# EAGLE board canSlaveV03_16s_nutzen (EAGLE 6.3), part 1 of 6
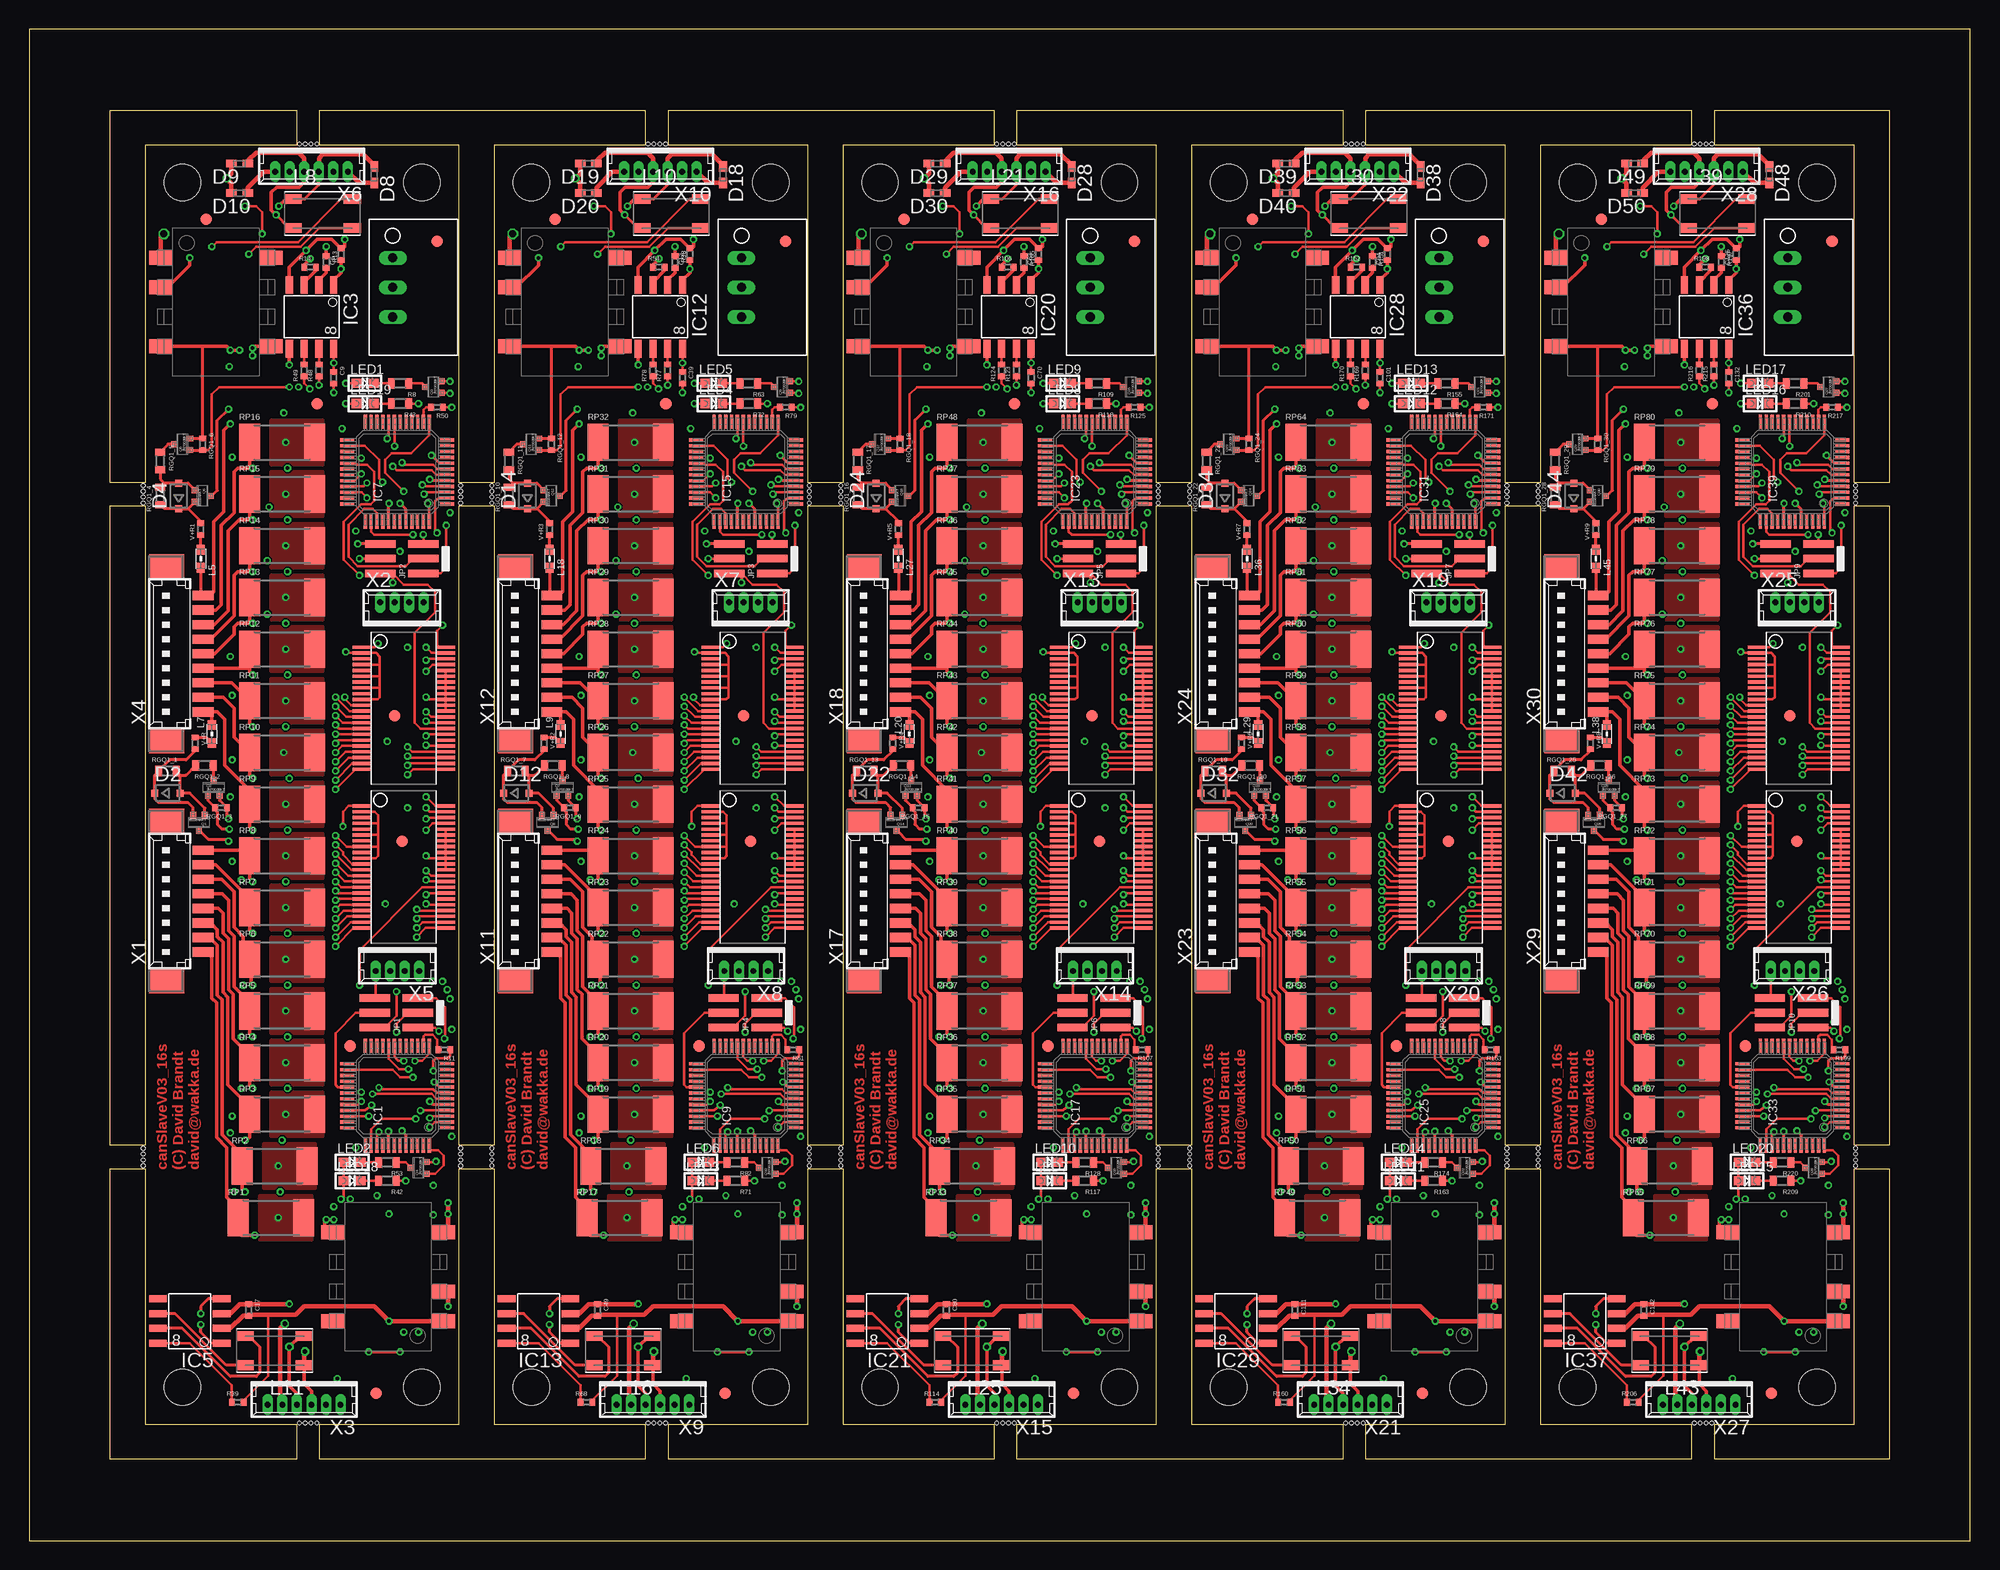
[diagram p0: board, top side]
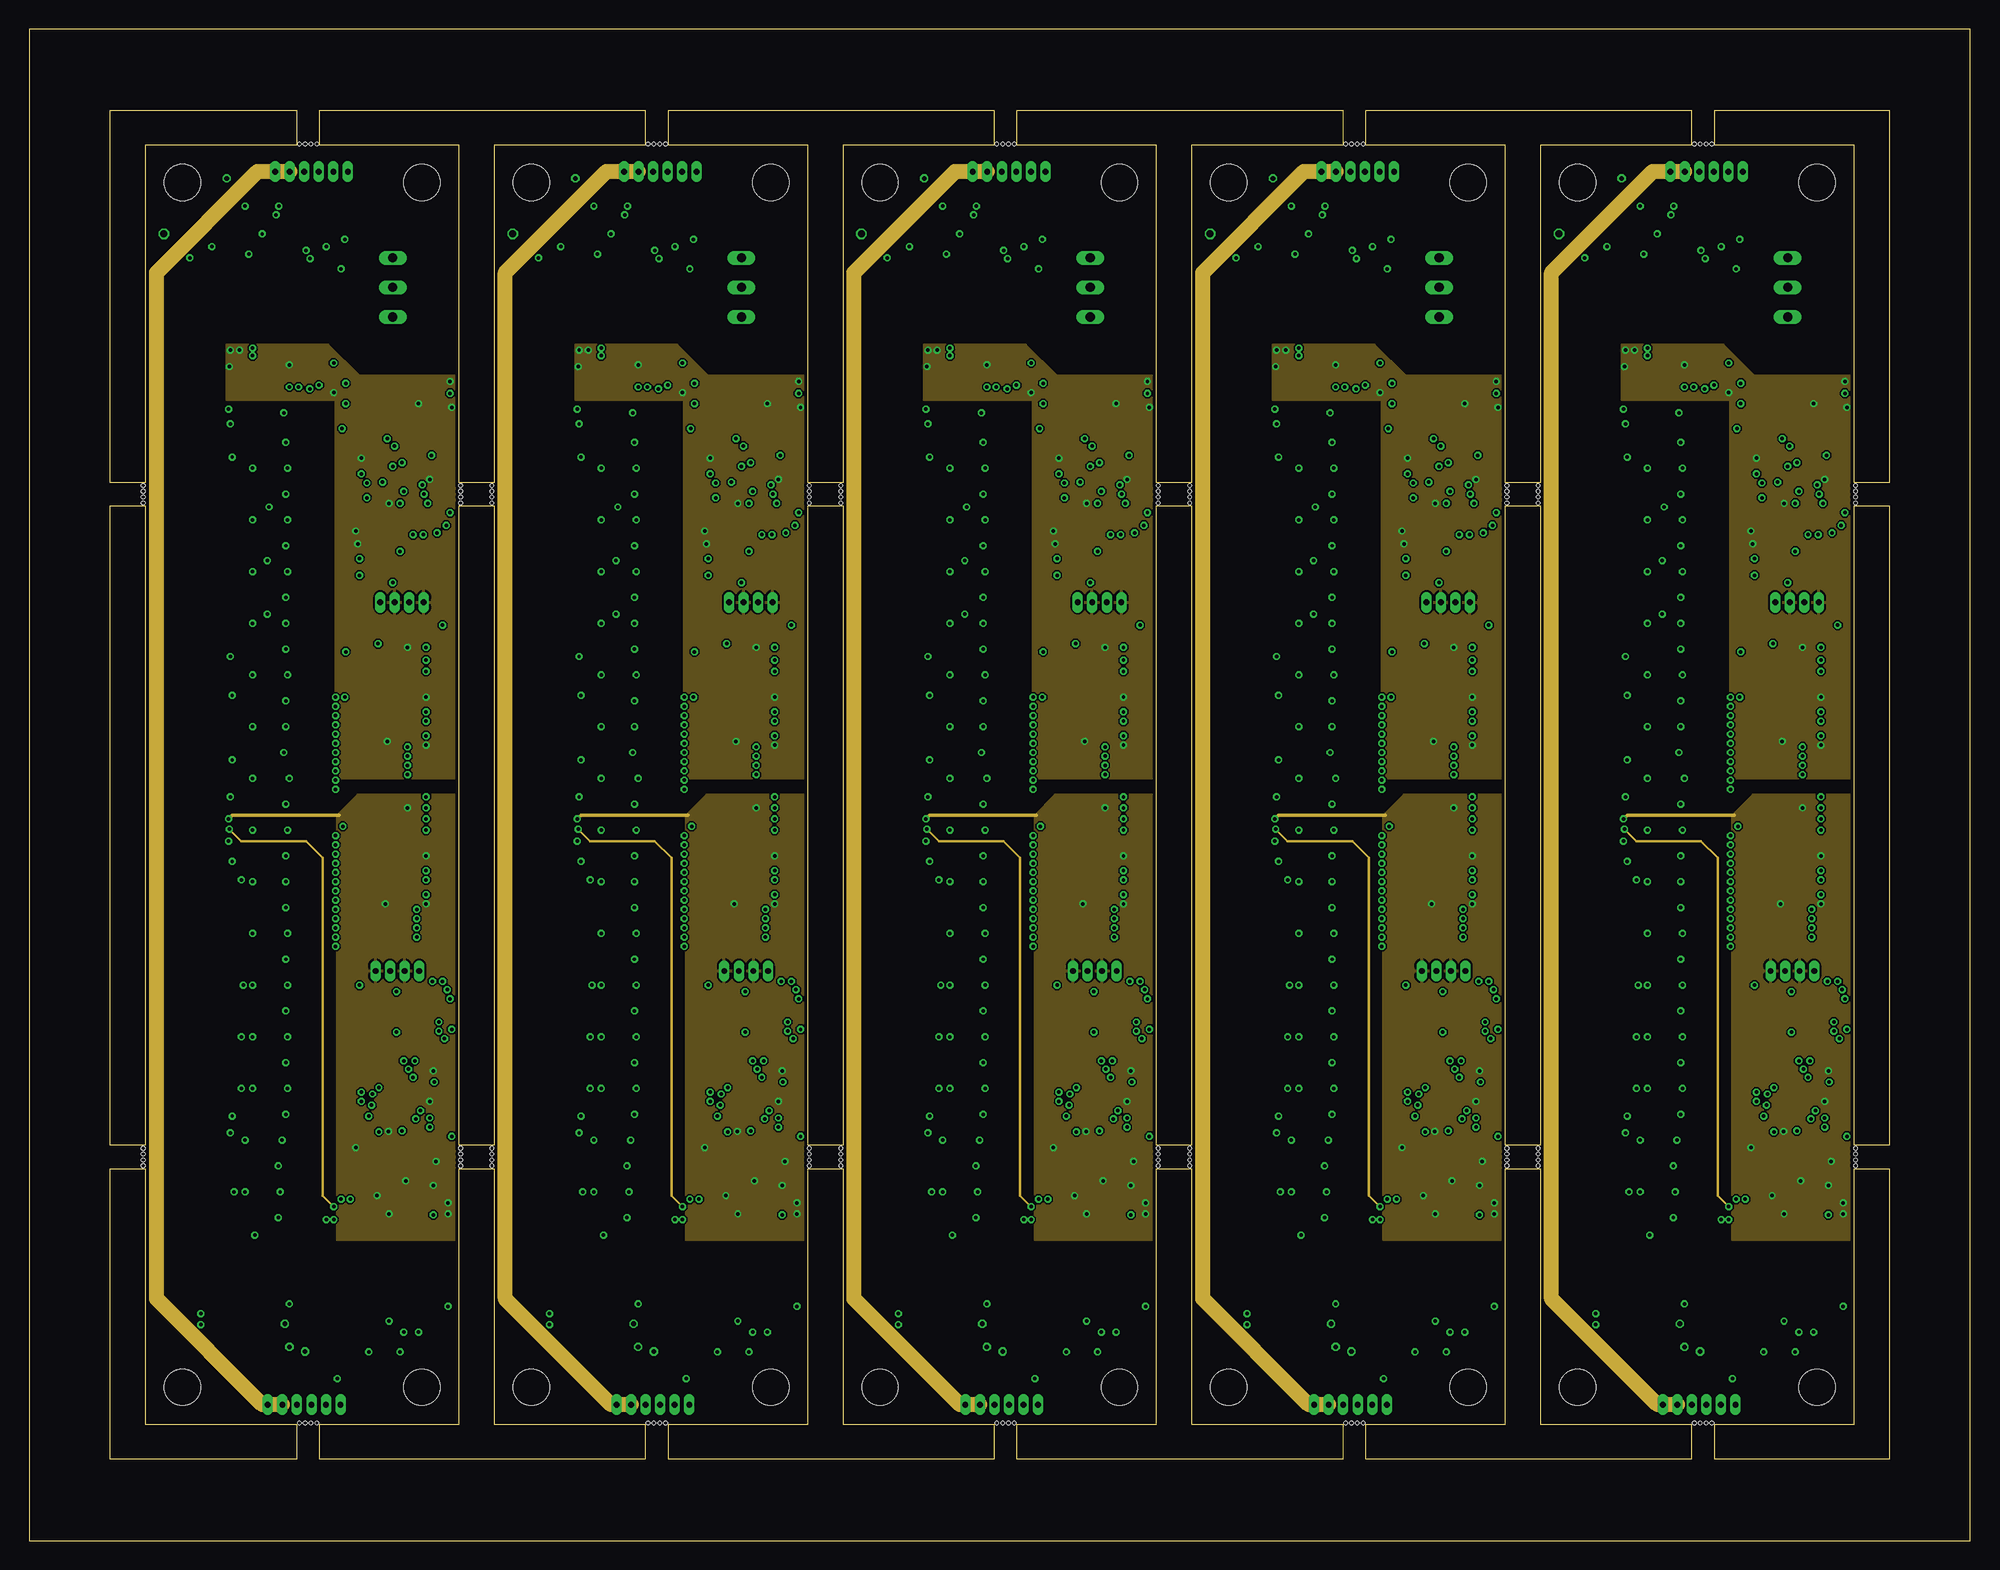
[diagram p1: board, inner layer Route2]
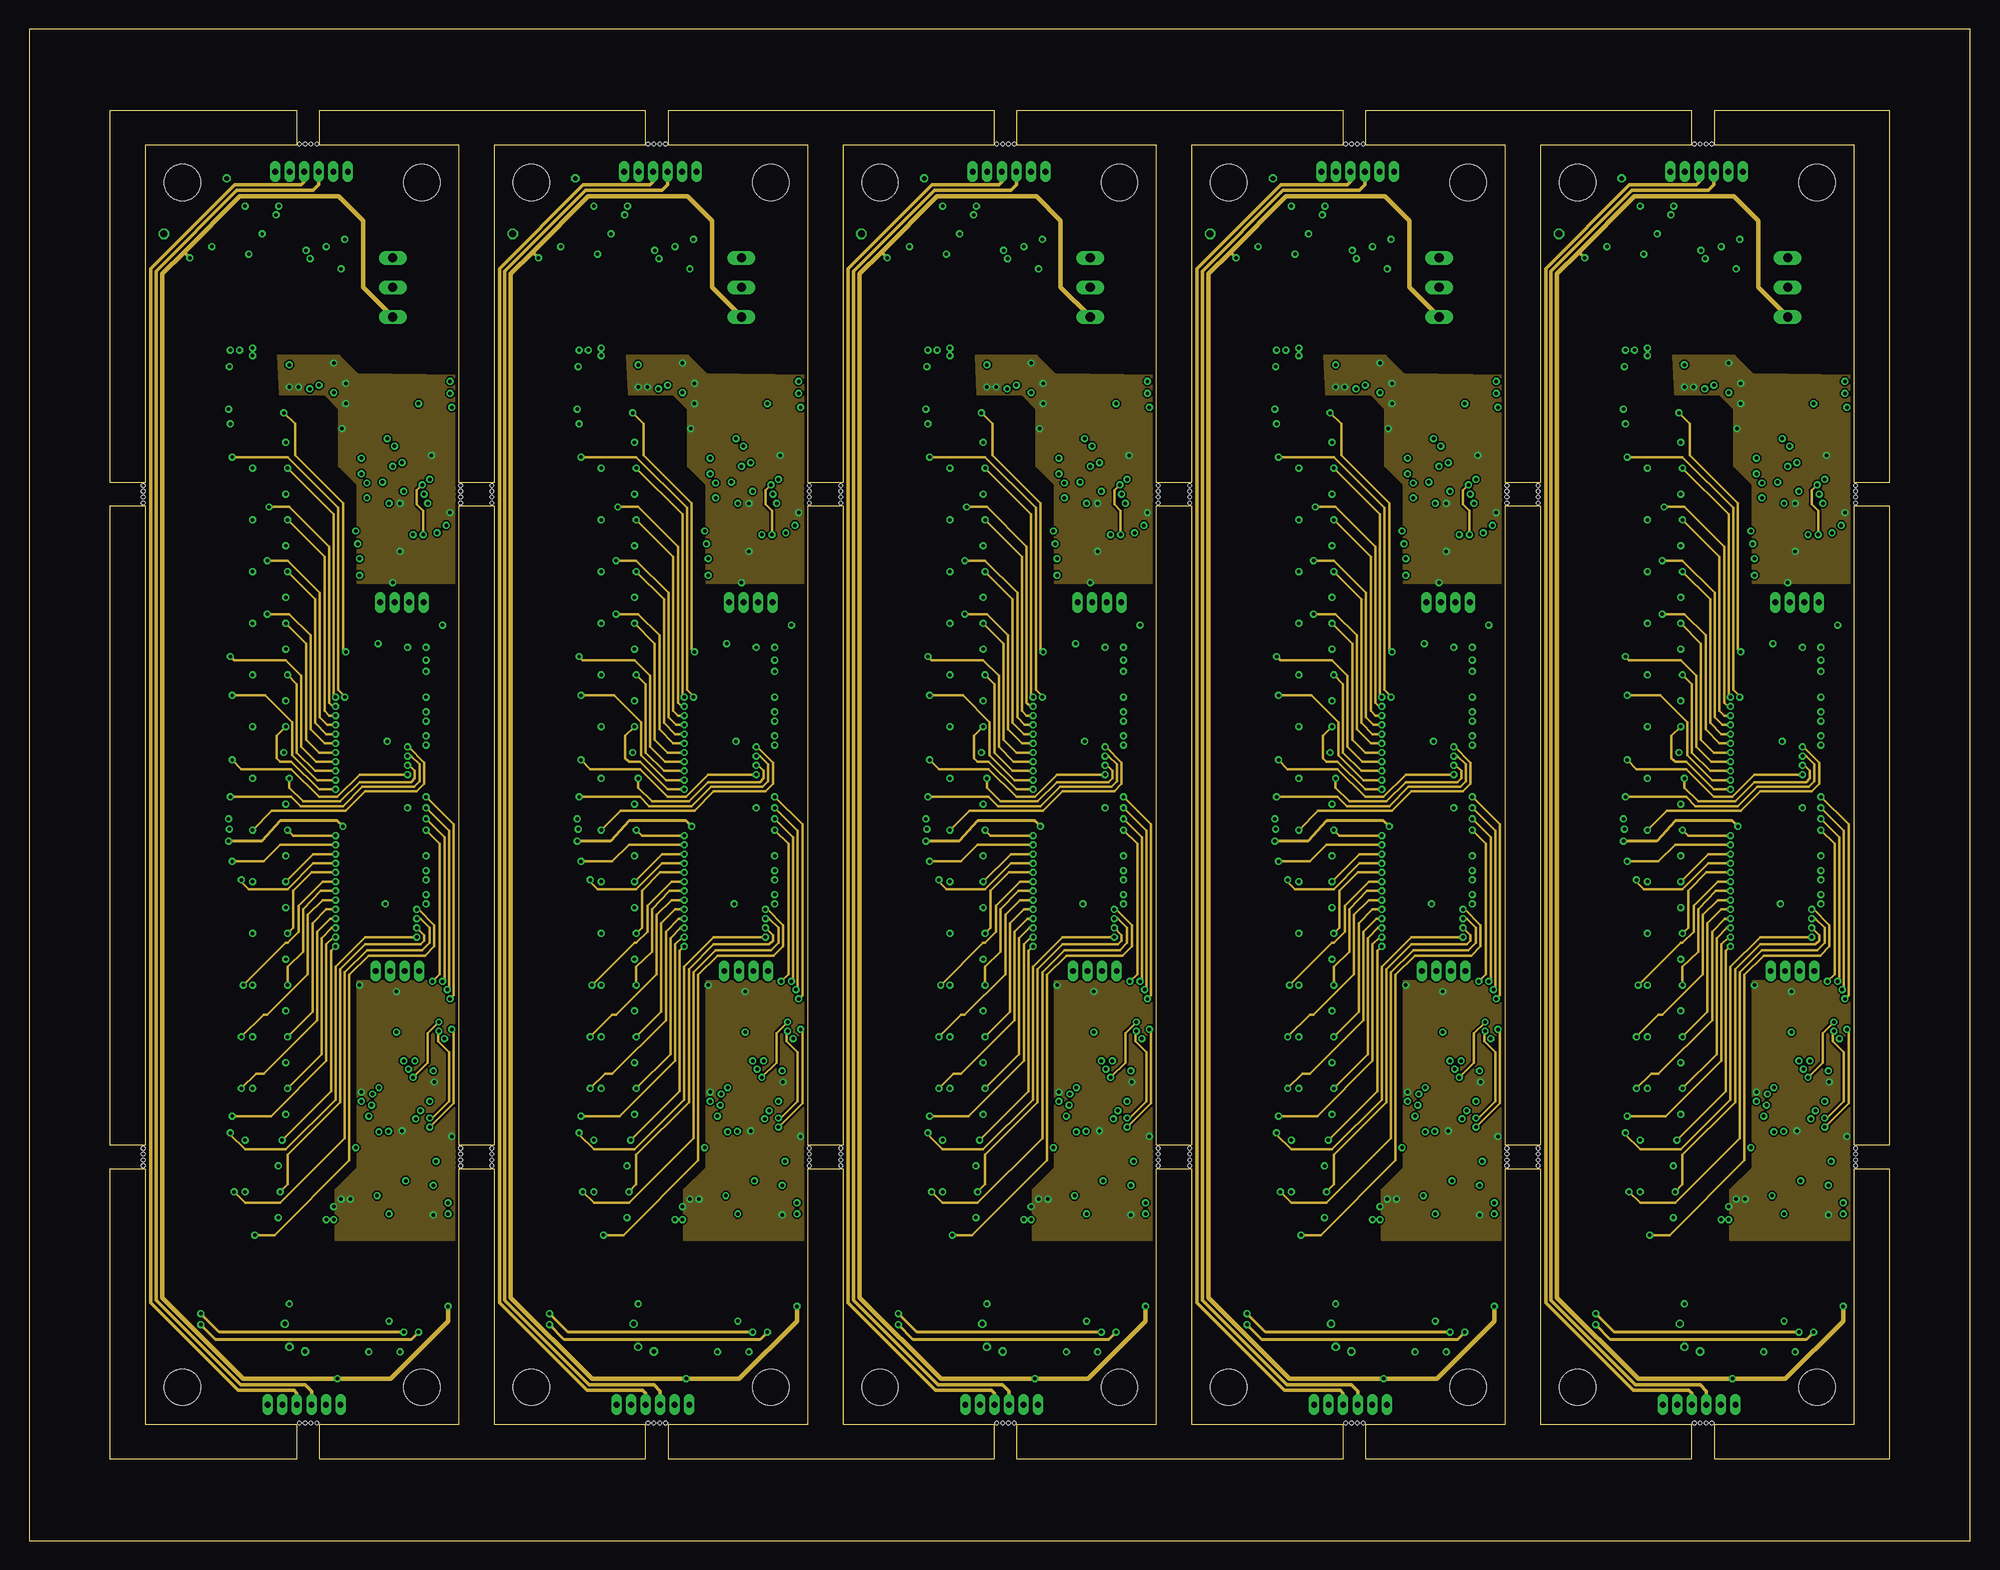
[diagram p2: board, inner layer Route15]
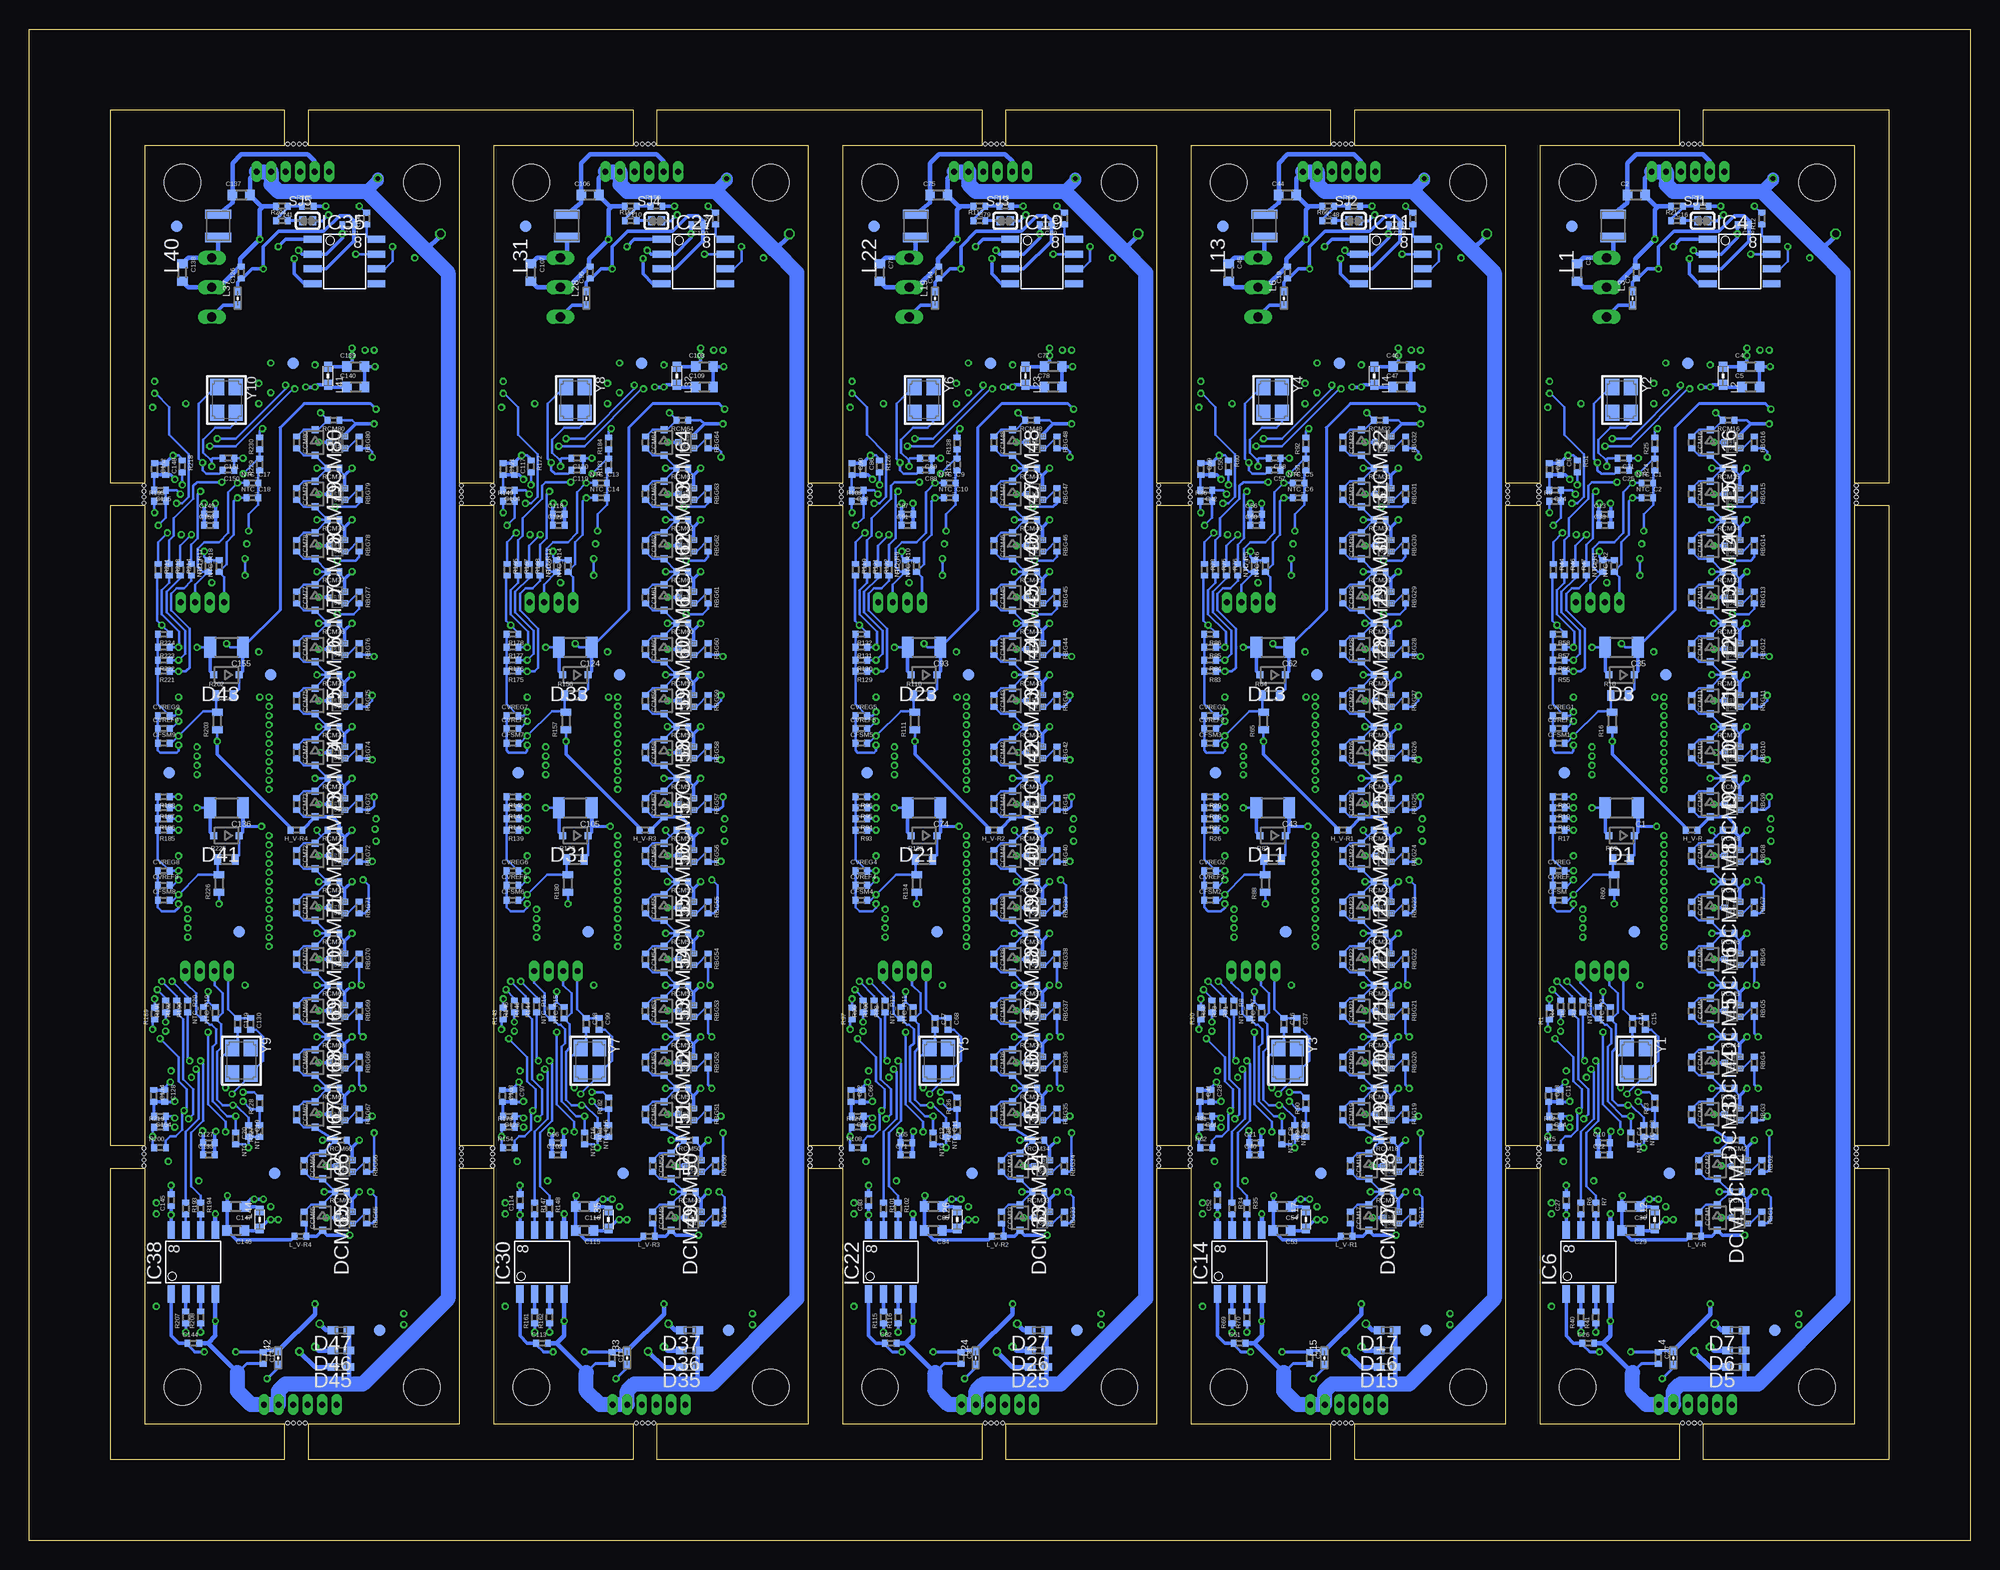
[diagram p3: board, bottom side, seen from below]

Size 167 x 130 mm. Coordinates in mm from the lower left corner, seen from the top.
Outline: 37,10 37,32 40,32 40,10 53,10 53,7 25,7 25,10 37,10
Outline: 37,34 37,89 40,89 40,34 37,34
Outline: 37,91 37,120 25,120 25,123 53,123 53,120 40,120 40,91 37,91
Outline: 23,123 23,120 10,120 10,91 7,91 7,123 23,123
Outline: 7,89 10,89 10,34 7,34 7,89
Outline: 7,32 10,32 10,10 23,10 23,7 7,7 7,32
Outline: 67,10 67,32 70,32 70,10 83,10 83,7 55,7 55,10 67,10
Outline: 67,34 67,89 70,89 70,34 67,34
Outline: 67,91 67,120 55,120 55,123 83,123 83,120 70,120 70,91 67,91
Outline: 97,10 97,32 100,32 100,10 113,10 113,7 85,7 85,10 97,10
Outline: 97,34 97,89 100,89 100,34 97,34
Outline: 97,91 97,120 85,120 85,123 113,123 113,120 100,120 100,91 97,91
Outline: 127,10 127,32 130,32 130,10 143,10 143,7 115,7 115,10 127,10
Outline: 127,34 127,89 130,89 130,34 127,34
Outline: 127,91 127,120 115,120 115,123 143,123 143,120 130,120 130,91 127,91
Outline: 157,10 157,32 160,32 160,7 145,7 145,10 157,10
Outline: 157,34 157,89 160,89 160,34 157,34
Outline: 157,91 157,120 145,120 145,123 160,123 160,91 157,91
Outline: 0,0 167,0 167,130 0,130 0,0
Copper layers (1+2*15+16): Top 0.035mm / dielectric 0.38mm / Route2 0.035mm / dielectric 0.71mm / Route15 0.035mm / dielectric 0.38mm / Bottom 0.035mm
Design rules "PCB-POOL Standard_ML4 *": minimum track width 0.15mm, minimum drill 0.3mm, track to track 0.15mm, track to pad 0.15mm, pad to pad 0.15mm, via to via 0.15mm, smd to smd 0.15mm, copper to edge 0.3mm, drill to drill 0.2mm, minimum pad ring 0.2mm, minimum via ring 0.15mm, stop-mask expansion 0.075mm, vias tented up to drill 0.41mm, thermal gap 0.2mm
Holes 3.1 mm at 33.8,13.2 13.2,13.2 33.8,116.8 13.2,116.8 63.8,13.2 43.2,13.2 63.8,116.8 43.2,116.8 93.8,13.2 73.2,13.2 93.8,116.8 73.2,116.8 123.8,13.2 103.2,13.2 123.8,116.8 103.2,116.8 153.8,13.2 133.2,13.2 153.8,116.8 133.2,116.8
Holes 0.3 mm at 23.25,10.12 23.75,10.12 24.25,10.12 24.75,10.12 53.25,10.12 53.75,10.12 54.25,10.12 54.75,10.12 83.25,10.12 83.75,10.12 84.25,10.12 84.75,10.12 113.25,10.12 113.75,10.12 114.25,10.12 114.75,10.12 143.25,10.12 143.75,10.12 144.25,10.12 144.75,10.12 143.25,120.12 143.75,120.12 144.25,120.12 144.75,120.12 113.25,120.12 113.75,120.12 114.25,120.12 114.75,120.12 83.25,120.12 83.75,120.12 84.25,120.12 84.75,120.12 53.25,120.12 53.75,120.12 54.25,120.12 54.75,120.12 23.25,120.12 23.75,120.12 24.25,120.12 24.75,120.12 39.83,89.25 39.83,89.75 39.83,90.25 39.83,90.75 39.83,32.25 39.83,32.75 39.83,33.25 39.83,33.75 69.83,89.25 69.83,89.75 69.83,90.25 69.83,90.75 69.83,32.25 69.83,32.75 69.83,33.25 69.83,33.75 99.83,89.25 99.83,89.75 99.83,90.25 99.83,90.75 99.83,32.25 99.83,32.75 99.83,33.25 99.83,33.75 129.82,89.25 129.82,89.75 129.82,90.25 129.82,90.75 129.82,32.25 129.82,32.75 129.82,33.25 129.82,33.75 37.12,89.25 37.12,89.75 37.12,90.25 37.12,90.75 37.12,32.25 37.12,32.75 37.12,33.25 37.12,33.75 67.12,89.25 67.12,89.75 67.12,90.25 67.12,90.75 67.12,32.25 67.12,32.75 67.12,33.25 67.12,33.75 97.12,89.25 97.12,89.75 97.12,90.25 97.12,90.75 97.12,32.25 97.12,32.75 97.12,33.25 97.12,33.75 127.12,89.25 127.12,89.75 127.12,90.25 127.12,90.75 127.12,32.25 127.12,32.75 127.12,33.25 127.12,33.75 157.12,89.25 157.12,89.75 157.12,90.25 157.12,90.75 157.12,32.25 157.12,32.75 157.12,33.25 157.12,33.75 9.82,89.25 9.82,89.75 9.82,90.25 9.82,90.75 9.82,32.25 9.82,32.75 9.82,33.25 9.82,33.75
tRestrict: area 30.8,10.2 to 36.8,16.2; area 10.2,10.2 to 16.2,16.2; area 30.8,113.8 to 36.8,119.8; area 10.2,113.8 to 16.2,119.8; area 60.8,10.2 to 66.8,16.2; area 40.2,10.2 to 46.2,16.2; area 60.8,113.8 to 66.8,119.8; area 40.2,113.8 to 46.2,119.8; area 90.8,10.2 to 96.8,16.2; area 70.2,10.2 to 76.2,16.2; area 90.8,113.8 to 96.8,119.8; area 70.2,113.8 to 76.2,119.8; area 120.8,10.2 to 126.8,16.2; area 100.2,10.2 to 106.2,16.2; area 120.8,113.8 to 126.8,119.8; area 100.2,113.8 to 106.2,119.8; area 150.8,10.2 to 156.8,16.2; area 130.2,10.2 to 136.2,16.2; area 150.8,113.8 to 156.8,119.8; area 130.2,113.8 to 136.2,119.8
bRestrict: area 30.8,10.2 to 36.8,16.2; area 10.2,10.2 to 16.2,16.2; area 30.8,113.8 to 36.8,119.8; area 10.2,113.8 to 16.2,119.8; area 60.8,10.2 to 66.8,16.2; area 40.2,10.2 to 46.2,16.2; area 60.8,113.8 to 66.8,119.8; area 40.2,113.8 to 46.2,119.8; area 90.8,10.2 to 96.8,16.2; area 70.2,10.2 to 76.2,16.2; area 90.8,113.8 to 96.8,119.8; area 70.2,113.8 to 76.2,119.8; area 120.8,10.2 to 126.8,16.2; area 100.2,10.2 to 106.2,16.2; area 120.8,113.8 to 126.8,119.8; area 100.2,113.8 to 106.2,119.8; area 150.8,10.2 to 156.8,16.2; area 130.2,10.2 to 136.2,16.2; area 150.8,113.8 to 156.8,119.8; area 130.2,113.8 to 136.2,119.8

## Footprints (pad centres in the part's own frame; a part is rotated, then mirrored left to right if it is on the bottom)
C1206 = smd 1 x 1.8: 1 -1.4,0; 2 1.4,0
C0603 = smd 0.8 x 0.9: 1 -0.75,0; 2 0.75,0
C0402 = smd 0.5 x 0.6: 1 -0.5,0; 2 0.5,0
SOD323-R = smd 0.6 x 0.6: A 1.1,0; C -1.1,0
WESURGE_0402 = smd 0.9 x 0.65: 1 -0.7,0; 2 0.7,0
ISF = smd 1.2 x 2: 1 -3.81,-4.75; 2 -1.27,-4.75; 4 3.81,-4.75; 5 3.81,4.75; 8 -3.81,4.75
TSR1 = drill 0.8 long: 1 -2.54,0; 2 0,0; 3 2.54,0
FIDUCIAL_1MM = smd 1 x 1: 1 0,0
R0402 = smd 0.5 x 0.6: 1 -0.5,0; 2 0.5,0
LQFP48 = smd 0.28 x 1.2: 1 -2.75,-4.3; 2 -2.25,-4.3; 3 -1.75,-4.3; 4 -1.25,-4.3; 5 -0.75,-4.3; 6 -0.25,-4.3; 7 0.25,-4.3; 8 0.75,-4.3; 9 1.25,-4.3; 10 1.75,-4.3; 11 2.25,-4.3; 12 2.75,-4.3; 25 2.75,4.3; 26 2.25,4.3; 27 1.75,4.3; 28 1.25,4.3; 29 0.75,4.3; 30 0.25,4.3; 31 -0.25,4.3; 32 -0.75,4.3; 33 -1.25,4.3; 34 -1.75,4.3; 35 -2.25,4.3; 36 -2.75,4.3 | smd 1.2 x 0.28: 13 4.3,-2.75; 14 4.3,-2.25; 15 4.3,-1.75; 16 4.3,-1.25; 17 4.3,-0.75; 18 4.3,-0.25; 19 4.3,0.25; 20 4.3,0.75; 21 4.3,1.25; 22 4.3,1.75; 23 4.3,2.25; 24 4.3,2.75; 37 -4.3,2.75; 38 -4.3,2.25; 39 -4.3,1.75; 40 -4.3,1.25; 41 -4.3,0.75; 42 -4.3,0.25; 43 -4.3,-0.25; 44 -4.3,-0.75; 45 -4.3,-1.25; 46 -4.3,-1.75; 47 -4.3,-2.25; 48 -4.3,-2.75
44SSOP = smd 1.6 x 0.28: 1 -3.6,5.25; 2 -3.6,4.75; 3 -3.6,4.25; 4 -3.6,3.75; 5 -3.6,3.25; 6 -3.6,2.75; 7 -3.6,2.25; 8 -3.6,1.75; 9 -3.6,1.25; 10 -3.6,0.75; 11 -3.6,0.25; 12 -3.6,-0.25; 13 -3.6,-0.75; 14 -3.6,-1.25; 15 -3.6,-1.75; 16 -3.6,-2.25; 17 -3.6,-2.75; 18 -3.6,-3.25; 19 -3.6,-3.75; 20 -3.6,-4.25; 21 -3.6,-4.75; 22 -3.6,-5.25; 23 3.6,-5.25; 24 3.6,-4.75; 25 3.6,-4.25; 26 3.6,-3.75; 27 3.6,-3.25; 28 3.6,-2.75; 29 3.6,-2.25; 30 3.6,-1.75; 31 3.6,-1.25; 32 3.6,-0.75; 33 3.6,-0.25; 34 3.6,0.25; 35 3.6,0.75; 36 3.6,1.25; 37 3.6,1.75; 38 3.6,2.25; 39 3.6,2.75; 40 3.6,3.25; 41 3.6,3.75; 42 3.6,4.25; 43 3.6,4.75; 44 3.6,5.25
SO-8 = smd 1.524 x 0.61: 1 -2.743,1.905; 2 -2.743,0.635; 3 -2.743,-0.635; 4 -2.743,-1.905; 5 2.743,-1.905; 6 2.743,-0.635; 7 2.743,0.635; 8 2.743,1.905
2X03_1.27MM_SMT = smd 0.65 x 2.6: 1 -1.27,-1.85; 2 -1.27,1.85; 3 0,-1.85; 4 0,1.85; 5 1.27,-1.85; 6 1.27,1.85
WE-PMI_1008 = smd 0.8 x 2.2: 1 -1,0; 2 1,0
0603 = smd 0.85 x 0.7: 1 -0.775,0; 2 0.775,0
0402 = smd 0.7 x 0.6: 1 -0.6,0; 2 0.6,0
WE-SL1 = smd 1.5 x 0.85: 1 -2.55,-1.25; 3 -2.55,1.25; 4 2.55,1.25; 5 2.55,-1.25
CHIPLED_0603 = smd 0.8 x 0.8: A 0,-0.75; C 0,0.75
SOT416 = smd 0.5 x 0.6: 1 -0.5,-0.65; 2 0.5,-0.65; 3 0,0.65
R0603 = smd 0.6 x 0.9: 1 -0.75,0; 2 0.75,0
R2512 = smd 1.8 x 3.2: 1 -2.8,0; 2 2.8,0
SOLDERJUMPER_REFLOW_NOPASTE_SMALL = smd 0.584 x 0.762: 1 -0.445,0; 2 0.445,0
53398-08 = smd 0.8 x 1.8: 1 4.375,-2.5; 2 3.125,-2.5; 3 1.875,-2.5; 4 0.625,-2.5; 5 -0.625,-2.5; 6 -1.875,-2.5; 7 -3.125,-2.5; 8 -4.375,-2.5 | smd 2.1 x 3: S1 6.875,0.625; S2 -6.875,0.625
53047-04 = drill 0.5 pad 0.698 long: 1 1.875,0.45; 2 0.625,0.45; 3 -0.625,0.45; 4 -1.875,0.45
53047-06 = drill 0.5 pad 0.698 long: 1 3.125,0.45; 2 1.875,0.45; 3 0.625,0.45; 4 -0.625,0.45; 5 -1.875,0.45; 6 -3.125,0.45
53398-09 = smd 0.8 x 1.8: 1 5,-2.5; 2 3.75,-2.5; 3 2.5,-2.5; 4 1.25,-2.5; 5 0,-2.5; 6 -1.25,-2.5; 7 -2.5,-2.5; 8 -3.75,-2.5; 9 -5,-2.5 | smd 2.1 x 3: S1 7.5,0.625; S2 -7.5,0.625
CRYSTAL_3.2X2.5 = smd 1.4 x 1.2: 1 -1.1,-0.8; 2 1.1,0.8; GND1 -1.1,0.8; GND2 1.1,-0.8

## Placement (x,y rotation side)
C1  10u,50V  [C1206]  30.02,63.02 180 bottom
C2  10u,50V  [C0603]  28.75,115.73 0 bottom
C3  10u,50V  [C0603]  33.83,109.06 270 bottom
C4  10u,50V  [C0603]  18.9,100.96 0 bottom
C5  10u,50V  [C0603]  18.9,99.22 0 bottom
C6  100n  [C0402]  26.84,110.65 90 top
C7  1u  [C0402]  28.75,109.06 90 bottom
C8  10n  [C0402]  35.25,92.15 270 bottom
C9  100n  [C0402]  26.2,100.01 270 top
C10  10n  [C0402]  31.52,34.21 0 bottom
C11  10n  [C0402]  35.33,38.26 270 bottom
C12  100n  [C0402]  56.84,110.65 90 top
C13  10n  [C0402]  31.44,88.26 0 bottom
C14  18p  [C0402]  29.06,44.45 270 bottom
C15  18p  [C0402]  27.95,44.45 270 bottom
C16  47n  [C0402]  25.25,114.78 180 bottom
C17  100n  [C0402]  18.9,19.84 270 top
C18  100n  [C0402]  19.54,113.19 180 bottom
C19  1u  [C0402]  58.74,109.06 90 bottom
C20  1u  [C0402]  26.84,15.71 270 bottom
C21  10n  [C0402]  61.52,34.21 0 bottom
C22  100n  [C0402]  31.52,33.18 0 bottom
C23  100n  [C0402]  36.29,38.26 270 bottom
C24  100n  [C0402]  35.73,90.33 180 bottom
C25  18p  [C0402]  29.86,92.07 180 bottom
C26  100n  [C0402]  32.87,16.98 0 bottom
C27  100n  [C0402]  34.78,29.29 90 bottom
C28  10n  [C0402]  65.33,38.26 270 bottom
C29  10u,50V  [C0603]  29.22,26.67 180 bottom
C30  10u,50V  [C0603]  29.22,28.73 180 bottom
C31  18p  [C0402]  29.86,93.11 180 bottom
C32  100n  [C0402]  36.21,92.15 270 bottom
C33  100n  [C0402]  31.44,87.31 0 bottom
C34  100n  [C0402]  35.73,36.51 180 bottom
C35  10u,50V  [C1206]  30.02,76.83 180 bottom
C36  18p  [C0402]  59.06,44.45 270 bottom
C37  18p  [C0402]  57.95,44.45 270 bottom
C38  100n  [C0402]  49.54,113.19 180 bottom
C39  100n  [C0402]  56.2,100.01 270 top
C40  100n  [C0402]  61.52,33.18 0 bottom
C41  100n  [C0402]  66.29,38.26 270 bottom
C42  100n  [C0402]  65.73,90.33 180 bottom
C43  10u,50V  [C1206]  60.02,63.02 180 bottom
C44  10u,50V  [C0603]  58.74,115.73 0 bottom
C45  10u,50V  [C0603]  63.83,109.06 270 bottom
C46  10u,50V  [C0603]  48.9,100.96 0 bottom
C47  10u,50V  [C0603]  48.9,99.22 0 bottom
C48  47n  [C0402]  55.25,114.78 180 bottom
C49  100n  [C0402]  48.9,19.84 270 top
C50  1u  [C0402]  56.84,15.71 270 bottom
C51  100n  [C0402]  62.87,16.98 0 bottom
C52  100n  [C0402]  64.78,29.29 90 bottom
C53  10u,50V  [C0603]  59.22,26.67 180 bottom
C54  10u,50V  [C0603]  59.22,28.73 180 bottom
C55  10n  [C0402]  65.25,92.15 270 bottom
C56  10n  [C0402]  61.44,88.26 0 bottom
C57  18p  [C0402]  59.86,92.07 180 bottom
C58  18p  [C0402]  59.86,93.11 180 bottom
C59  100n  [C0402]  66.21,92.15 270 bottom
C60  100n  [C0402]  61.44,87.31 0 bottom
C61  100n  [C0402]  65.73,36.51 180 bottom
C62  10u,50V  [C1206]  60.02,76.83 180 bottom
C63  100n  [C0402]  86.84,110.65 90 top
C64  1u  [C0402]  88.75,109.06 90 bottom
C65  10n  [C0402]  91.52,34.21 0 bottom
C66  10n  [C0402]  95.33,38.26 270 bottom
C67  18p  [C0402]  89.06,44.45 270 bottom
C68  18p  [C0402]  87.95,44.45 270 bottom
C69  100n  [C0402]  79.54,113.19 180 bottom
C70  100n  [C0402]  86.2,100.01 270 top
C71  100n  [C0402]  91.52,33.18 0 bottom
C72  100n  [C0402]  96.29,38.26 270 bottom
C73  100n  [C0402]  95.73,90.33 180 bottom
C74  10u,50V  [C1206]  90.02,63.02 180 bottom
C75  10u,50V  [C0603]  88.75,115.73 0 bottom
C76  10u,50V  [C0603]  93.83,109.06 270 bottom
C77  10u,50V  [C0603]  78.9,100.96 0 bottom
C78  10u,50V  [C0603]  78.9,99.22 0 bottom
C79  47n  [C0402]  85.25,114.78 180 bottom
C80  100n  [C0402]  78.9,19.84 270 top
C81  1u  [C0402]  86.84,15.71 270 bottom
C82  100n  [C0402]  92.87,16.98 0 bottom
C83  100n  [C0402]  94.78,29.29 90 bottom
C84  10u,50V  [C0603]  89.22,26.67 180 bottom
C85  10u,50V  [C0603]  89.22,28.73 180 bottom
C86  10n  [C0402]  95.25,92.15 270 bottom
C87  10n  [C0402]  91.44,88.26 0 bottom
C88  18p  [C0402]  89.86,92.07 180 bottom
C89  18p  [C0402]  89.86,93.11 180 bottom
C90  100n  [C0402]  96.21,92.15 270 bottom
C91  100n  [C0402]  91.44,87.31 0 bottom
C92  100n  [C0402]  95.73,36.51 180 bottom
C93  10u,50V  [C1206]  90.02,76.83 180 bottom
C94  100n  [C0402]  116.84,110.65 90 top
C95  1u  [C0402]  118.75,109.06 90 bottom
C96  10n  [C0402]  121.52,34.21 0 bottom
C97  10n  [C0402]  125.33,38.26 270 bottom
C98  18p  [C0402]  119.06,44.45 270 bottom
C99  18p  [C0402]  117.95,44.45 270 bottom
C100  100n  [C0402]  109.54,113.19 180 bottom
C101  100n  [C0402]  116.2,100.01 270 top
C102  100n  [C0402]  121.52,33.18 0 bottom
C103  100n  [C0402]  126.29,38.26 270 bottom
C104  100n  [C0402]  125.73,90.33 180 bottom
C105  10u,50V  [C1206]  120.02,63.02 180 bottom
C106  10u,50V  [C0603]  118.75,115.73 0 bottom
C107  10u,50V  [C0603]  123.83,109.06 270 bottom
C108  10u,50V  [C0603]  108.9,100.96 0 bottom
C109  10u,50V  [C0603]  108.9,99.22 0 bottom
C110  47n  [C0402]  115.25,114.78 180 bottom
C111  100n  [C0402]  108.9,19.84 270 top
C112  1u  [C0402]  116.84,15.71 270 bottom
C113  100n  [C0402]  122.87,16.98 0 bottom
C114  100n  [C0402]  124.78,29.29 90 bottom
C115  10u,50V  [C0603]  119.22,26.67 180 bottom
C116  10u,50V  [C0603]  119.22,28.73 180 bottom
C117  10n  [C0402]  125.25,92.15 270 bottom
C118  10n  [C0402]  121.44,88.26 0 bottom
C119  18p  [C0402]  119.86,92.07 180 bottom
C120  18p  [C0402]  119.86,93.11 180 bottom
C121  100n  [C0402]  126.21,92.15 270 bottom
C122  100n  [C0402]  121.44,87.31 0 bottom
C123  100n  [C0402]  125.73,36.51 180 bottom
C124  10u,50V  [C1206]  120.02,76.83 180 bottom
C125  100n  [C0402]  146.84,110.65 90 top
C126  1u  [C0402]  148.75,109.06 90 bottom
C127  10n  [C0402]  151.52,34.21 0 bottom
C128  10n  [C0402]  155.33,38.26 270 bottom
C129  18p  [C0402]  149.06,44.45 270 bottom
C130  18p  [C0402]  147.95,44.45 270 bottom
C131  100n  [C0402]  139.54,113.19 180 bottom
C132  100n  [C0402]  146.21,100.01 270 top
C133  100n  [C0402]  151.52,33.18 0 bottom
C134  100n  [C0402]  156.29,38.26 270 bottom
C135  100n  [C0402]  155.73,90.33 180 bottom
C136  10u,50V  [C1206]  150.01,63.02 180 bottom
C137  10u,50V  [C0603]  148.75,115.73 0 bottom
C138  10u,50V  [C0603]  153.82,109.06 270 bottom
C139  10u,50V  [C0603]  138.9,100.96 0 bottom
C140  10u,50V  [C0603]  138.9,99.22 0 bottom
C141  47n  [C0402]  145.25,114.78 180 bottom
C142  100n  [C0402]  138.9,19.84 270 top
C143  1u  [C0402]  146.84,15.71 270 bottom
C144  100n  [C0402]  152.87,16.98 0 bottom
C145  100n  [C0402]  154.78,29.29 90 bottom
C146  10u,50V  [C0603]  149.22,26.67 180 bottom
C147  10u,50V  [C0603]  149.22,28.73 180 bottom
C148  10n  [C0402]  155.25,92.15 270 bottom
C149  10n  [C0402]  151.44,88.26 0 bottom
C150  18p  [C0402]  149.86,92.07 180 bottom
C151  18p  [C0402]  149.86,93.11 180 bottom
C152  100n  [C0402]  156.21,92.15 270 bottom
C153  100n  [C0402]  151.44,87.31 0 bottom
C154  100n  [C0402]  155.73,36.51 180 bottom
C155  10u,50V  [C1206]  150.01,76.83 180 bottom
CCM1  100n  [C0402]  23.35,27.78 270 bottom
CCM2  100n  [C0402]  23.35,32.23 270 bottom
CCM3  100n  [C0402]  23.98,36.67 270 bottom
CCM4  100n  [C0402]  23.98,41.12 270 bottom
CCM5  100n  [C0402]  23.98,45.56 270 bottom
CCM6  100n  [C0402]  23.98,50.01 270 bottom
CCM7  100n  [C0402]  23.98,54.45 270 bottom
CCM8  100n  [C0402]  23.98,58.9 270 bottom
CCM9  100n  [C0402]  23.98,63.34 270 bottom
CCM10  100n  [C0402]  23.98,67.78 270 bottom
CCM11  100n  [C0402]  23.98,72.23 270 bottom
CCM12  100n  [C0402]  23.98,76.67 270 bottom
CCM13  100n  [C0402]  23.98,81.12 270 bottom
CCM14  100n  [C0402]  23.98,85.56 270 bottom
CCM15  100n  [C0402]  23.98,90.01 270 bottom
CCM16  100n  [C0402]  23.98,94.45 270 bottom
CCM17  100n  [C0402]  53.35,27.78 270 bottom
CCM18  100n  [C0402]  53.35,32.23 270 bottom
CCM19  100n  [C0402]  53.98,36.67 270 bottom
CCM20  100n  [C0402]  53.98,41.12 270 bottom
CCM21  100n  [C0402]  53.98,45.56 270 bottom
CCM22  100n  [C0402]  53.98,50.01 270 bottom
CCM23  100n  [C0402]  53.98,54.45 270 bottom
CCM24  100n  [C0402]  53.98,58.9 270 bottom
CCM25  100n  [C0402]  53.98,63.34 270 bottom
CCM26  100n  [C0402]  53.98,67.78 270 bottom
CCM27  100n  [C0402]  53.98,72.23 270 bottom
CCM28  100n  [C0402]  53.98,76.67 270 bottom
CCM29  100n  [C0402]  53.98,81.12 270 bottom
CCM30  100n  [C0402]  53.98,85.56 270 bottom
CCM31  100n  [C0402]  53.98,90.01 270 bottom
CCM32  100n  [C0402]  53.98,94.45 270 bottom
CCM33  100n  [C0402]  83.35,27.78 270 bottom
CCM34  100n  [C0402]  83.35,32.23 270 bottom
CCM35  100n  [C0402]  83.98,36.67 270 bottom
CCM36  100n  [C0402]  83.98,41.12 270 bottom
CCM37  100n  [C0402]  83.98,45.56 270 bottom
CCM38  100n  [C0402]  83.98,50.01 270 bottom
CCM39  100n  [C0402]  83.98,54.45 270 bottom
CCM40  100n  [C0402]  83.98,58.9 270 bottom
CCM41  100n  [C0402]  83.98,63.34 270 bottom
CCM42  100n  [C0402]  83.98,67.78 270 bottom
CCM43  100n  [C0402]  83.98,72.23 270 bottom
CCM44  100n  [C0402]  83.98,76.67 270 bottom
CCM45  100n  [C0402]  83.98,81.12 270 bottom
CCM46  100n  [C0402]  83.98,85.56 270 bottom
CCM47  100n  [C0402]  83.98,90.01 270 bottom
CCM48  100n  [C0402]  83.98,94.45 270 bottom
CCM49  100n  [C0402]  113.35,27.78 270 bottom
CCM50  100n  [C0402]  113.35,32.23 270 bottom
CCM51  100n  [C0402]  113.98,36.67 270 bottom
CCM52  100n  [C0402]  113.98,41.12 270 bottom
CCM53  100n  [C0402]  113.98,45.56 270 bottom
CCM54  100n  [C0402]  113.98,50.01 270 bottom
CCM55  100n  [C0402]  113.98,54.45 270 bottom
CCM56  100n  [C0402]  113.98,58.9 270 bottom
CCM57  100n  [C0402]  113.98,63.34 270 bottom
CCM58  100n  [C0402]  113.98,67.78 270 bottom
CCM59  100n  [C0402]  113.98,72.23 270 bottom
CCM60  100n  [C0402]  113.98,76.67 270 bottom
CCM61  100n  [C0402]  113.98,81.12 270 bottom
CCM62  100n  [C0402]  113.98,85.56 270 bottom
CCM63  100n  [C0402]  113.98,90.01 270 bottom
CCM64  100n  [C0402]  113.98,94.45 270 bottom
CCM65  100n  [C0402]  143.35,27.78 270 bottom
CCM66  100n  [C0402]  143.35,32.23 270 bottom
CCM67  100n  [C0402]  143.98,36.67 270 bottom
CCM68  100n  [C0402]  143.98,41.12 270 bottom
CCM69  100n  [C0402]  143.98,45.56 270 bottom
CCM70  100n  [C0402]  143.98,50.01 270 bottom
CCM71  100n  [C0402]  143.98,54.45 270 bottom
CCM72  100n  [C0402]  143.98,58.9 270 bottom
CCM73  100n  [C0402]  143.98,63.34 270 bottom
CCM74  100n  [C0402]  143.98,67.78 270 bottom
CCM75  100n  [C0402]  143.98,72.23 270 bottom
CCM76  100n  [C0402]  143.98,76.67 270 bottom
CCM77  100n  [C0402]  143.98,81.12 270 bottom
CCM78  100n  [C0402]  143.98,85.56 270 bottom
CCM79  100n  [C0402]  143.98,90.01 270 bottom
CCM80  100n  [C0402]  143.98,94.45 270 bottom
CFSM  1u  [C0402]  35.41,55.09 0 bottom
CFSM1  1u  [C0402]  35.41,68.58 0 bottom
CFSM2  1u  [C0402]  65.41,55.09 0 bottom
CFSM3  1u  [C0402]  65.41,68.58 0 bottom
CFSM4  1u  [C0402]  95.41,55.09 0 bottom
CFSM5  1u  [C0402]  95.41,68.58 0 bottom
CFSM6  1u  [C0402]  125.41,55.09 0 bottom
CFSM7  1u  [C0402]  125.41,68.58 0 bottom
CFSM8  1u  [C0402]  155.41,55.09 0 bottom
CFSM9  1u  [C0402]  155.41,68.58 0 bottom
CVREF  1u  [C0402]  35.41,56.35 0 bottom
CVREF1  1u  [C0402]  35.41,69.85 0 bottom
CVREF2  1u  [C0402]  65.41,56.35 0 bottom
CVREF3  1u  [C0402]  65.41,69.85 0 bottom
CVREF4  1u  [C0402]  95.41,56.35 0 bottom
CVREF5  1u  [C0402]  95.41,69.85 0 bottom
CVREF6  1u  [C0402]  125.41,56.35 0 bottom
CVREF7  1u  [C0402]  125.41,69.85 0 bottom
CVREF8  1u  [C0402]  155.41,56.35 0 bottom
CVREF9  1u  [C0402]  155.41,69.85 0 bottom
CVREG  1u  [C0402]  35.41,57.62 0 bottom
CVREG1  1u  [C0402]  35.41,70.96 0 bottom
CVREG2  1u  [C0402]  65.41,57.62 0 bottom
CVREG3  1u  [C0402]  65.41,70.96 0 bottom
CVREG4  1u  [C0402]  95.41,57.62 0 bottom
CVREG5  1u  [C0402]  95.41,70.96 0 bottom
CVREG6  1u  [C0402]  125.41,57.62 0 bottom
CVREG7  1u  [C0402]  125.41,70.96 0 bottom
CVREG8  1u  [C0402]  155.41,57.62 0 bottom
CVREG9  1u  [C0402]  155.41,70.96 0 bottom
D1  40V  [SOD323-R]  30.02,60.64 180 bottom
D2  12V  [SOD323-R]  11.92,64.29 0 top
D3  40V  [SOD323-R]  30.02,74.45 180 bottom
D4  12V  [SOD323-R]  12.87,89.85 90 top
D5  WE-VE_0402  [WESURGE_0402]  20.17,14.92 0 bottom
D6  WE-VE_0402  [WESURGE_0402]  20.17,16.35 0 bottom
D7  WE-VE_0402  [WESURGE_0402]  20.17,18.1 0 bottom
D8  WE-VE_0402  [WESURGE_0402]  29.7,117.47 90 top
D9  WE-VE_0402  [WESURGE_0402]  18.11,118.43 0 top
D10  WE-VE_0402  [WESURGE_0402]  18.11,115.89 0 top
D11  40V  [SOD323-R]  60.02,60.64 180 bottom
D12  12V  [SOD323-R]  41.92,64.29 0 top
D13  40V  [SOD323-R]  60.02,74.45 180 bottom
D14  12V  [SOD323-R]  42.87,89.85 90 top
D15  WE-VE_0402  [WESURGE_0402]  50.17,14.92 0 bottom
D16  WE-VE_0402  [WESURGE_0402]  50.17,16.35 0 bottom
D17  WE-VE_0402  [WESURGE_0402]  50.17,18.1 0 bottom
D18  WE-VE_0402  [WESURGE_0402]  59.7,117.47 90 top
D19  WE-VE_0402  [WESURGE_0402]  48.11,118.43 0 top
D20  WE-VE_0402  [WESURGE_0402]  48.11,115.89 0 top
D21  40V  [SOD323-R]  90.02,60.64 180 bottom
D22  12V  [SOD323-R]  71.92,64.29 0 top
D23  40V  [SOD323-R]  90.02,74.45 180 bottom
D24  12V  [SOD323-R]  72.87,89.85 90 top
D25  WE-VE_0402  [WESURGE_0402]  80.17,14.92 0 bottom
D26  WE-VE_0402  [WESURGE_0402]  80.17,16.35 0 bottom
D27  WE-VE_0402  [WESURGE_0402]  80.17,18.1 0 bottom
D28  WE-VE_0402  [WESURGE_0402]  89.7,117.47 90 top
D29  WE-VE_0402  [WESURGE_0402]  78.11,118.43 0 top
D30  WE-VE_0402  [WESURGE_0402]  78.11,115.89 0 top
D31  40V  [SOD323-R]  120.02,60.64 180 bottom
D32  12V  [SOD323-R]  101.92,64.29 0 top
D33  40V  [SOD323-R]  120.02,74.45 180 bottom
D34  12V  [SOD323-R]  102.87,89.85 90 top
D35  WE-VE_0402  [WESURGE_0402]  110.17,14.92 0 bottom
D36  WE-VE_0402  [WESURGE_0402]  110.17,16.35 0 bottom
D37  WE-VE_0402  [WESURGE_0402]  110.17,18.1 0 bottom
D38  WE-VE_0402  [WESURGE_0402]  119.7,117.47 90 top
D39  WE-VE_0402  [WESURGE_0402]  108.11,118.43 0 top
D40  WE-VE_0402  [WESURGE_0402]  108.11,115.89 0 top
D41  40V  [SOD323-R]  150.01,60.64 180 bottom
D42  12V  [SOD323-R]  131.92,64.29 0 top
D43  40V  [SOD323-R]  150.01,74.45 180 bottom
D44  12V  [SOD323-R]  132.87,89.85 90 top
D45  WE-VE_0402  [WESURGE_0402]  140.17,14.92 0 bottom
D46  WE-VE_0402  [WESURGE_0402]  140.17,16.35 0 bottom
D47  WE-VE_0402  [WESURGE_0402]  140.17,18.1 0 bottom
D48  WE-VE_0402  [WESURGE_0402]  149.7,117.47 90 top
D49  WE-VE_0402  [WESURGE_0402]  138.11,118.43 0 top
D50  WE-VE_0402  [WESURGE_0402]  138.11,115.89 0 top
DCDC1  TES 1-0510  [ISF]  16.08,106.52 270 top
DCDC2  TES 1-0510  [ISF]  30.89,22.7 90 top
DCDC3  TES 1-0510  [ISF]  46.08,106.52 270 top
DCDC4  TES 1-0510  [ISF]  60.89,22.7 90 top
DCDC5  TES 1-0510  [ISF]  76.08,106.52 270 top
DCDC6  TES 1-0510  [ISF]  90.89,22.7 90 top
DCDC7  TES 1-0510  [ISF]  106.08,106.52 270 top
DCDC8  TES 1-0510  [ISF]  120.89,22.7 90 top
DCDC9  TES 1-0510  [ISF]  136.08,106.52 270 top
DCDC10  TES 1-0510  [ISF]  150.89,22.7 90 top
DCIN  TSR 1-2450  [TSR1]  31.29,107.79 270 top
DCIN1  TSR 1-2450  [TSR1]  61.28,107.79 270 top
DCIN2  TSR 1-2450  [TSR1]  91.28,107.79 270 top
DCIN3  TSR 1-2450  [TSR1]  121.28,107.79 270 top
DCIN4  TSR 1-2450  [TSR1]  151.28,107.79 270 top
DCM1  7.5  [SOD323-R]  21.76,27.78 270 bottom
DCM2  7.5  [SOD323-R]  21.76,32.23 270 bottom
DCM3  7.5  [SOD323-R]  22.39,36.67 270 bottom
DCM4  7.5  [SOD323-R]  22.39,41.12 270 bottom
DCM5  7.5  [SOD323-R]  22.39,45.56 270 bottom
DCM6  7.5  [SOD323-R]  22.39,50.01 270 bottom
DCM7  7.5  [SOD323-R]  22.39,54.45 270 bottom
DCM8  7.5  [SOD323-R]  22.39,58.9 270 bottom
DCM9  7.5  [SOD323-R]  22.39,63.34 270 bottom
DCM10  7.5  [SOD323-R]  22.39,67.78 270 bottom
DCM11  7.5  [SOD323-R]  22.39,72.23 270 bottom
DCM12  7.5  [SOD323-R]  22.39,76.67 270 bottom
DCM13  7.5  [SOD323-R]  22.39,81.12 270 bottom
DCM14  7.5  [SOD323-R]  22.39,85.56 270 bottom
DCM15  7.5  [SOD323-R]  22.39,90.01 270 bottom
DCM16  7.5  [SOD323-R]  22.39,94.45 270 bottom
DCM17  7.5  [SOD323-R]  51.76,27.78 270 bottom
DCM18  7.5  [SOD323-R]  51.76,32.23 270 bottom
DCM19  7.5  [SOD323-R]  52.4,36.67 270 bottom
DCM20  7.5  [SOD323-R]  52.4,41.12 270 bottom
DCM21  7.5  [SOD323-R]  52.4,45.56 270 bottom
DCM22  7.5  [SOD323-R]  52.4,50.01 270 bottom
DCM23  7.5  [SOD323-R]  52.4,54.45 270 bottom
DCM24  7.5  [SOD323-R]  52.4,58.9 270 bottom
DCM25  7.5  [SOD323-R]  52.4,63.34 270 bottom
DCM26  7.5  [SOD323-R]  52.4,67.78 270 bottom
DCM27  7.5  [SOD323-R]  52.4,72.23 270 bottom
DCM28  7.5  [SOD323-R]  52.4,76.67 270 bottom
DCM29  7.5  [SOD323-R]  52.4,81.12 270 bottom
DCM30  7.5  [SOD323-R]  52.4,85.56 270 bottom
DCM31  7.5  [SOD323-R]  52.4,90.01 270 bottom
DCM32  7.5  [SOD323-R]  52.4,94.45 270 bottom
DCM33  7.5  [SOD323-R]  81.76,27.78 270 bottom
DCM34  7.5  [SOD323-R]  81.76,32.23 270 bottom
DCM35  7.5  [SOD323-R]  82.39,36.67 270 bottom
DCM36  7.5  [SOD323-R]  82.39,41.12 270 bottom
DCM37  7.5  [SOD323-R]  82.39,45.56 270 bottom
DCM38  7.5  [SOD323-R]  82.39,50.01 270 bottom
DCM39  7.5  [SOD323-R]  82.39,54.45 270 bottom
DCM40  7.5  [SOD323-R]  82.39,58.9 270 bottom
DCM41  7.5  [SOD323-R]  82.39,63.34 270 bottom
DCM42  7.5  [SOD323-R]  82.39,67.78 270 bottom
DCM43  7.5  [SOD323-R]  82.39,72.23 270 bottom
DCM44  7.5  [SOD323-R]  82.39,76.67 270 bottom
DCM45  7.5  [SOD323-R]  82.39,81.12 270 bottom
DCM46  7.5  [SOD323-R]  82.39,85.56 270 bottom
DCM47  7.5  [SOD323-R]  82.39,90.01 270 bottom
DCM48  7.5  [SOD323-R]  82.39,94.45 270 bottom
DCM49  7.5  [SOD323-R]  111.76,27.78 270 bottom
DCM50  7.5  [SOD323-R]  111.76,32.23 270 bottom
DCM51  7.5  [SOD323-R]  112.39,36.67 270 bottom
DCM52  7.5  [SOD323-R]  112.39,41.12 270 bottom
DCM53  7.5  [SOD323-R]  112.39,45.56 270 bottom
DCM54  7.5  [SOD323-R]  112.39,50.01 270 bottom
DCM55  7.5  [SOD323-R]  112.39,54.45 270 bottom
DCM56  7.5  [SOD323-R]  112.39,58.9 270 bottom
DCM57  7.5  [SOD323-R]  112.39,63.34 270 bottom
DCM58  7.5  [SOD323-R]  112.39,67.78 270 bottom
DCM59  7.5  [SOD323-R]  112.39,72.23 270 bottom
DCM60  7.5  [SOD323-R]  112.39,76.67 270 bottom
DCM61  7.5  [SOD323-R]  112.39,81.12 270 bottom
DCM62  7.5  [SOD323-R]  112.39,85.56 270 bottom
DCM63  7.5  [SOD323-R]  112.39,90.01 270 bottom
DCM64  7.5  [SOD323-R]  112.39,94.45 270 bottom
DCM65  7.5  [SOD323-R]  141.76,27.78 270 bottom
DCM66  7.5  [SOD323-R]  141.76,32.23 270 bottom
DCM67  7.5  [SOD323-R]  142.4,36.67 270 bottom
DCM68  7.5  [SOD323-R]  142.4,41.12 270 bottom
DCM69  7.5  [SOD323-R]  142.4,45.56 270 bottom
DCM70  7.5  [SOD323-R]  142.4,50.01 270 bottom
DCM71  7.5  [SOD323-R]  142.4,54.45 270 bottom
DCM72  7.5  [SOD323-R]  142.4,58.9 270 bottom
DCM73  7.5  [SOD323-R]  142.4,63.34 270 bottom
DCM74  7.5  [SOD323-R]  142.4,67.78 270 bottom
DCM75  7.5  [SOD323-R]  142.4,72.23 270 bottom
DCM76  7.5  [SOD323-R]  142.4,76.67 270 bottom
DCM77  7.5  [SOD323-R]  142.4,81.12 270 bottom
DCM78  7.5  [SOD323-R]  142.4,85.56 270 bottom
DCM79  7.5  [SOD323-R]  142.4,90.01 270 bottom
DCM80  7.5  [SOD323-R]  142.4,94.45 270 bottom
FID1  FIDUCIAL""  [FIDUCIAL_1MM]  32.08,60.16 90 top
FID2  FIDUCIAL""  [FIDUCIAL_1MM]  31.44,70.96 90 top
FID3  FIDUCIAL""  [FIDUCIAL_1MM]  29.86,12.7 90 top
FID4  FIDUCIAL""  [FIDUCIAL_1MM]  15.25,113.66 90 top
FID5  FIDUCIAL""  [FIDUCIAL_1MM]  35.09,111.76 90 top
FID6  FIDUCIAL""  [FIDUCIAL_1MM]  24.78,97.79 90 top
FID7  FIDUCIAL""  [FIDUCIAL_1MM]  27.63,42.54 90 top
FID8  FIDUCIAL""  [FIDUCIAL_1MM]  24.3,101.28 270 bottom
FID9  FIDUCIAL""  [FIDUCIAL_1MM]  25.89,31.59 270 bottom
FID10  FIDUCIAL""  [FIDUCIAL_1MM]  16.84,18.1 270 bottom
FID11  FIDUCIAL""  [FIDUCIAL_1MM]  28.9,52.39 270 bottom
FID12  FIDUCIAL""  [FIDUCIAL_1MM]  34.3,113.03 270 bottom
FID13  FIDUCIAL""  [FIDUCIAL_1MM]  26.2,74.45 270 bottom
FID14  FIDUCIAL""  [FIDUCIAL_1MM]  34.94,66.04 270 bottom
FID15  FIDUCIAL""  [FIDUCIAL_1MM]  62.08,60.16 90 top
FID16  FIDUCIAL""  [FIDUCIAL_1MM]  61.44,70.96 90 top
FID17  FIDUCIAL""  [FIDUCIAL_1MM]  59.86,12.7 90 top
FID18  FIDUCIAL""  [FIDUCIAL_1MM]  45.25,113.66 90 top
FID19  FIDUCIAL""  [FIDUCIAL_1MM]  65.09,111.76 90 top
FID20  FIDUCIAL""  [FIDUCIAL_1MM]  54.78,97.79 90 top
FID21  FIDUCIAL""  [FIDUCIAL_1MM]  57.63,42.54 90 top
FID22  FIDUCIAL""  [FIDUCIAL_1MM]  54.3,101.28 270 bottom
FID23  FIDUCIAL""  [FIDUCIAL_1MM]  55.89,31.59 270 bottom
FID24  FIDUCIAL""  [FIDUCIAL_1MM]  46.84,18.1 270 bottom
FID25  FIDUCIAL""  [FIDUCIAL_1MM]  58.9,52.39 270 bottom
FID26  FIDUCIAL""  [FIDUCIAL_1MM]  64.3,113.03 270 bottom
FID27  FIDUCIAL""  [FIDUCIAL_1MM]  56.2,74.45 270 bottom
FID28  FIDUCIAL""  [FIDUCIAL_1MM]  64.94,66.04 270 bottom
FID29  FIDUCIAL""  [FIDUCIAL_1MM]  92.08,60.16 90 top
FID30  FIDUCIAL""  [FIDUCIAL_1MM]  91.44,70.96 90 top
FID31  FIDUCIAL""  [FIDUCIAL_1MM]  89.86,12.7 90 top
FID32  FIDUCIAL""  [FIDUCIAL_1MM]  75.25,113.66 90 top
FID33  FIDUCIAL""  [FIDUCIAL_1MM]  95.09,111.76 90 top
FID34  FIDUCIAL""  [FIDUCIAL_1MM]  84.78,97.79 90 top
FID35  FIDUCIAL""  [FIDUCIAL_1MM]  87.63,42.54 90 top
FID36  FIDUCIAL""  [FIDUCIAL_1MM]  84.3,101.28 270 bottom
FID37  FIDUCIAL""  [FIDUCIAL_1MM]  85.89,31.59 270 bottom
FID38  FIDUCIAL""  [FIDUCIAL_1MM]  76.84,18.1 270 bottom
FID39  FIDUCIAL""  [FIDUCIAL_1MM]  88.9,52.39 270 bottom
FID40  FIDUCIAL""  [FIDUCIAL_1MM]  94.3,113.03 270 bottom
FID41  FIDUCIAL""  [FIDUCIAL_1MM]  86.2,74.45 270 bottom
FID42  FIDUCIAL""  [FIDUCIAL_1MM]  94.94,66.04 270 bottom
FID43  FIDUCIAL""  [FIDUCIAL_1MM]  122.08,60.16 90 top
FID44  FIDUCIAL""  [FIDUCIAL_1MM]  121.44,70.96 90 top
FID45  FIDUCIAL""  [FIDUCIAL_1MM]  119.86,12.7 90 top
FID46  FIDUCIAL""  [FIDUCIAL_1MM]  105.25,113.66 90 top
FID47  FIDUCIAL""  [FIDUCIAL_1MM]  125.09,111.76 90 top
FID48  FIDUCIAL""  [FIDUCIAL_1MM]  114.78,97.79 90 top
FID49  FIDUCIAL""  [FIDUCIAL_1MM]  117.63,42.54 90 top
FID50  FIDUCIAL""  [FIDUCIAL_1MM]  114.3,101.28 270 bottom
FID51  FIDUCIAL""  [FIDUCIAL_1MM]  115.89,31.59 270 bottom
FID52  FIDUCIAL""  [FIDUCIAL_1MM]  106.84,18.1 270 bottom
FID53  FIDUCIAL""  [FIDUCIAL_1MM]  118.9,52.39 270 bottom
FID54  FIDUCIAL""  [FIDUCIAL_1MM]  124.3,113.03 270 bottom
FID55  FIDUCIAL""  [FIDUCIAL_1MM]  116.2,74.45 270 bottom
FID56  FIDUCIAL""  [FIDUCIAL_1MM]  124.94,66.04 270 bottom
FID57  FIDUCIAL""  [FIDUCIAL_1MM]  152.08,60.16 90 top
FID58  FIDUCIAL""  [FIDUCIAL_1MM]  151.44,70.96 90 top
FID59  FIDUCIAL""  [FIDUCIAL_1MM]  149.86,12.7 90 top
FID60  FIDUCIAL""  [FIDUCIAL_1MM]  135.25,113.66 90 top
FID61  FIDUCIAL""  [FIDUCIAL_1MM]  155.09,111.76 90 top
FID62  FIDUCIAL""  [FIDUCIAL_1MM]  144.78,97.79 90 top
FID63  FIDUCIAL""  [FIDUCIAL_1MM]  147.63,42.54 90 top
FID64  FIDUCIAL""  [FIDUCIAL_1MM]  144.3,101.28 270 bottom
FID65  FIDUCIAL""  [FIDUCIAL_1MM]  145.89,31.59 270 bottom
FID66  FIDUCIAL""  [FIDUCIAL_1MM]  136.84,18.1 270 bottom
FID67  FIDUCIAL""  [FIDUCIAL_1MM]  148.9,52.39 270 bottom
FID68  FIDUCIAL""  [FIDUCIAL_1MM]  154.3,113.03 270 bottom
FID69  FIDUCIAL""  [FIDUCIAL_1MM]  146.21,74.45 270 bottom
FID70  FIDUCIAL""  [FIDUCIAL_1MM]  154.94,66.04 270 bottom
H_V-R  100  [R0402]  23.98,61.12 180 bottom
H_V-R1  100  [R0402]  53.98,61.12 180 bottom
H_V-R2  100  [R0402]  83.98,61.12 180 bottom
H_V-R3  100  [R0402]  113.98,61.12 180 bottom
H_V-R4  100  [R0402]  143.98,61.12 180 bottom
IC1  LPC11C1X  [LQFP48]  31.68,38.26 90 top
IC2  LTC6803-4  [44SSOP]  32.24,57.94 0 top
IC3  ADUM1201  [SO-8]  24.3,105.25 270 top
IC4  MCP2551  [SO-8]  19.86,110.01 0 bottom
IC5  MCP2551  [SO-8]  13.82,18.89 180 top
IC6  ADUM1201  [SO-8]  32.87,23.97 90 bottom
IC7  LPC11C1X  [LQFP48]  31.68,91.92 90 top
IC8  LTC6803-4  [44SSOP]  32.24,71.59 0 top
IC9  LPC11C1X  [LQFP48]  61.68,38.26 90 top
IC10  LTC6803-4  [44SSOP]  62.24,57.94 0 top
IC11  MCP2551  [SO-8]  49.85,110.01 0 bottom
IC12  ADUM1201  [SO-8]  54.3,105.25 270 top
IC13  MCP2551  [SO-8]  43.82,18.89 180 top
IC14  ADUM1201  [SO-8]  62.87,23.97 90 bottom
IC15  LPC11C1X  [LQFP48]  61.68,91.92 90 top
IC16  LTC6803-4  [44SSOP]  62.24,71.59 0 top
IC17  LPC11C1X  [LQFP48]  91.68,38.26 90 top
IC18  LTC6803-4  [44SSOP]  92.24,57.94 0 top
IC19  MCP2551  [SO-8]  79.86,110.01 0 bottom
IC20  ADUM1201  [SO-8]  84.3,105.25 270 top
IC21  MCP2551  [SO-8]  73.82,18.89 180 top
IC22  ADUM1201  [SO-8]  92.87,23.97 90 bottom
IC23  LPC11C1X  [LQFP48]  91.68,91.92 90 top
IC24  LTC6803-4  [44SSOP]  92.24,71.59 0 top
IC25  LPC11C1X  [LQFP48]  121.68,38.26 90 top
IC26  LTC6803-4  [44SSOP]  122.24,57.94 0 top
IC27  MCP2551  [SO-8]  109.86,110.01 0 bottom
IC28  ADUM1201  [SO-8]  114.3,105.25 270 top
IC29  MCP2551  [SO-8]  103.82,18.89 180 top
IC30  ADUM1201  [SO-8]  122.87,23.97 90 bottom
IC31  LPC11C1X  [LQFP48]  121.68,91.92 90 top
IC32  LTC6803-4  [44SSOP]  122.24,71.59 0 top
IC33  LPC11C1X  [LQFP48]  151.68,38.26 90 top
IC34  LTC6803-4  [44SSOP]  152.24,57.94 0 top
IC35  MCP2551  [SO-8]  139.85,110.01 0 bottom
IC36  ADUM1201  [SO-8]  144.3,105.25 270 top
IC37  MCP2551  [SO-8]  133.82,18.89 180 top
IC38  ADUM1201  [SO-8]  152.87,23.97 90 bottom
IC39  LPC11C1X  [LQFP48]  151.68,91.92 90 top
IC40  LTC6803-4  [44SSOP]  152.24,71.59 0 top
JP1  [2X03_1.27MM_SMT]  31.6,45.4 90 top
JP2  [2X03_1.27MM_SMT]  32.08,84.45 90 top
JP3  [2X03_1.27MM_SMT]  62.08,84.45 90 top
JP4  [2X03_1.27MM_SMT]  61.6,45.4 90 top
JP5  [2X03_1.27MM_SMT]  92.08,84.45 90 top
JP6  [2X03_1.27MM_SMT]  91.6,45.4 90 top
JP7  [2X03_1.27MM_SMT]  122.08,84.45 90 top
JP8  [2X03_1.27MM_SMT]  121.6,45.4 90 top
JP9  [2X03_1.27MM_SMT]  152.08,84.45 90 top
JP10  [2X03_1.27MM_SMT]  151.6,45.4 90 top
L1  WE-PMI_1008  [WE-PMI_1008]  30.73,113.07 90 bottom
L2  WE-CBF_0603  [0603]  21.28,100.17 90 bottom
L3  WE-CBF_0402  [0402]  29.06,106.84 270 bottom
L4  WE-CBF_0402  [0402]  25.57,15.71 270 bottom
L5  WE-CBF_0603  [0603]  14.78,84.45 90 top
L6  WE-CBF_0402  [0402]  59.06,106.84 270 bottom
L7  WE-CBF_0603  [0603]  15.73,69.37 270 top
L8  WE-SL1  [WE-SL1]  25.25,114.14 0 top
L9  WE-CBF_0603  [0603]  45.73,69.37 270 top
L10  WE-SL1  [WE-SL1]  55.25,114.14 0 top
L11  WE-SL1  [WE-SL1]  21.12,16.35 180 top
L12  WE-CBF_0603  [0603]  27.16,27.62 270 bottom
L13  WE-PMI_1008  [WE-PMI_1008]  60.73,113.07 90 bottom
L14  WE-CBF_0603  [0603]  51.28,100.17 90 bottom
L15  WE-CBF_0402  [0402]  55.57,15.71 270 bottom
L16  WE-SL1  [WE-SL1]  51.12,16.35 180 top
L17  WE-CBF_0603  [0603]  57.16,27.62 270 bottom
L18  WE-CBF_0603  [0603]  44.77,84.45 90 top
L19  WE-CBF_0402  [0402]  89.06,106.84 270 bottom
L20  WE-CBF_0603  [0603]  75.73,69.37 270 top
L21  WE-SL1  [WE-SL1]  85.25,114.14 0 top
L22  WE-PMI_1008  [WE-PMI_1008]  90.73,113.07 90 bottom
L23  WE-CBF_0603  [0603]  81.28,100.17 90 bottom
L24  WE-CBF_0402  [0402]  85.57,15.71 270 bottom
L25  WE-SL1  [WE-SL1]  81.12,16.35 180 top
L26  WE-CBF_0603  [0603]  87.16,27.62 270 bottom
L27  WE-CBF_0603  [0603]  74.78,84.45 90 top
L28  WE-CBF_0402  [0402]  119.06,106.84 270 bottom
L29  WE-CBF_0603  [0603]  105.73,69.37 270 top
L30  WE-SL1  [WE-SL1]  115.25,114.14 0 top
L31  WE-PMI_1008  [WE-PMI_1008]  120.73,113.07 90 bottom
L32  WE-CBF_0603  [0603]  111.28,100.17 90 bottom
L33  WE-CBF_0402  [0402]  115.57,15.71 270 bottom
L34  WE-SL1  [WE-SL1]  111.12,16.35 180 top
L35  WE-CBF_0603  [0603]  117.16,27.62 270 bottom
L36  WE-CBF_0603  [0603]  104.78,84.45 90 top
L37  WE-CBF_0402  [0402]  149.06,106.84 270 bottom
L38  WE-CBF_0603  [0603]  135.73,69.37 270 top
L39  WE-SL1  [WE-SL1]  145.25,114.14 0 top
L40  WE-PMI_1008  [WE-PMI_1008]  150.73,113.07 90 bottom
L41  WE-CBF_0603  [0603]  141.28,100.17 90 bottom
L42  WE-CBF_0402  [0402]  145.57,15.71 270 bottom
L43  WE-SL1  [WE-SL1]  141.12,16.35 180 top
L44  WE-CBF_0603  [0603]  147.16,27.62 270 bottom
L45  WE-CBF_0603  [0603]  134.78,84.45 90 top
L_V-R  100  [R0402]  23.66,26.19 180 bottom
L_V-R1  100  [R0402]  53.66,26.19 180 bottom
L_V-R2  100  [R0402]  83.67,26.19 180 bottom
L_V-R3  100  [R0402]  113.67,26.19 180 bottom
L_V-R4  100  [R0402]  143.66,26.19 180 bottom
LED1  [CHIPLED_0603]  28.9,99.53 270 top
LED2  [CHIPLED_0603]  27.79,32.54 270 top
LED3  [CHIPLED_0603]  57.79,30.95 270 top
LED4  [CHIPLED_0603]  58.9,97.79 270 top
LED5  [CHIPLED_0603]  58.9,99.53 270 top
LED6  [CHIPLED_0603]  57.79,32.54 270 top
LED7  [CHIPLED_0603]  87.79,30.95 270 top
LED8  [CHIPLED_0603]  88.9,97.79 270 top
LED9  [CHIPLED_0603]  88.9,99.53 270 top
LED10  [CHIPLED_0603]  87.79,32.54 270 top
LED11  [CHIPLED_0603]  117.79,30.95 270 top
LED12  [CHIPLED_0603]  118.9,97.79 270 top
LED13  [CHIPLED_0603]  118.9,99.53 270 top
LED14  [CHIPLED_0603]  117.79,32.54 270 top
LED15  [CHIPLED_0603]  147.79,30.95 270 top
LED16  [CHIPLED_0603]  148.9,97.79 270 top
LED17  [CHIPLED_0603]  148.9,99.53 270 top
LED18  [CHIPLED_0603]  27.79,30.95 270 top
LED19  [CHIPLED_0603]  28.9,97.79 270 top
LED20  [CHIPLED_0603]  147.79,32.54 270 top
NTC_C1  100n  [C0402]  27.79,90.96 0 bottom
NTC_C2  100n  [C0402]  27.79,89.69 0 bottom
NTC_C3  100n  [C0402]  28.11,35.24 270 bottom
NTC_C4  100n  [C0402]  29.22,34.61 270 bottom
NTC_C5  100n  [C0402]  57.79,90.96 0 bottom
NTC_C6  100n  [C0402]  57.79,89.69 0 bottom
NTC_C7  100n  [C0402]  58.11,35.24 270 bottom
NTC_C8  100n  [C0402]  59.22,34.61 270 bottom
NTC_C9  100n  [C0402]  87.79,90.96 0 bottom
NTC_C10  100n  [C0402]  87.79,89.69 0 bottom
NTC_C11  100n  [C0402]  88.11,35.24 270 bottom
NTC_C12  100n  [C0402]  89.22,34.61 270 bottom
NTC_C13  100n  [C0402]  117.79,90.96 0 bottom
NTC_C14  100n  [C0402]  117.79,89.69 0 bottom
NTC_C15  100n  [C0402]  118.11,35.24 270 bottom
NTC_C16  100n  [C0402]  119.22,34.61 270 bottom
NTC_C17  100n  [C0402]  147.79,90.96 0 bottom
NTC_C18  100n  [C0402]  147.79,89.69 0 bottom
NTC_C19  100n  [C0402]  148.11,35.24 270 bottom
NTC_C20  100n  [C0402]  149.22,34.61 270 bottom
NTC_R1  1k  [R0402]  31.6,83.82 90 bottom
NTC_R2  1k  [R0402]  30.65,83.82 90 bottom
NTC_R3  1k  [R0402]  30.97,45.4 90 bottom
NTC_R4  1k  [R0402]  32,45.4 90 bottom
NTC_R5  1k  [R0402]  61.6,83.82 90 bottom
NTC_R6  1k  [R0402]  60.65,83.82 90 bottom
NTC_R7  1k  [R0402]  60.97,45.4 90 bottom
NTC_R8  1k  [R0402]  62,45.4 90 bottom
NTC_R9  1k  [R0402]  91.6,83.82 90 bottom
NTC_R10  1k  [R0402]  90.65,83.82 90 bottom
NTC_R11  1k  [R0402]  90.97,45.4 90 bottom
NTC_R12  1k  [R0402]  92,45.4 90 bottom
NTC_R13  1k  [R0402]  121.6,83.82 90 bottom
NTC_R14  1k  [R0402]  120.65,83.82 90 bottom
NTC_R15  1k  [R0402]  120.97,45.4 90 bottom
NTC_R16  1k  [R0402]  122,45.4 90 bottom
NTC_R17  1k  [R0402]  151.6,83.82 90 bottom
NTC_R18  1k  [R0402]  150.65,83.82 90 bottom
NTC_R19  1k  [R0402]  150.97,45.4 90 bottom
NTC_R20  1k  [R0402]  152,45.4 90 bottom
Q1  BSS84AKT  [SOT416]  14.62,61.75 180 top
Q2  2N7002BKT  [SOT416]  15.89,64.77 0 top
Q3  2N7002BKT  [SOT416]  34.78,99.22 90 top
Q4  2N7002BKT  [SOT416]  33.51,32.07 90 top
Q5  2N7002BKT  [SOT416]  13.19,94.3 90 top
Q6  BSS84AKT  [SOT416]  14.93,89.85 270 top
Q7  2N7002BKT  [SOT416]  45.89,64.77 0 top
Q8  BSS84AKT  [SOT416]  44.62,61.75 180 top
Q9  2N7002BKT  [SOT416]  64.78,99.22 90 top
Q10  2N7002BKT  [SOT416]  63.51,32.07 90 top
Q11  2N7002BKT  [SOT416]  43.19,94.3 90 top
Q12  BSS84AKT  [SOT416]  44.93,89.85 270 top
Q13  2N7002BKT  [SOT416]  75.89,64.77 0 top
Q14  BSS84AKT  [SOT416]  74.62,61.75 180 top
Q15  2N7002BKT  [SOT416]  94.78,99.22 90 top
Q16  2N7002BKT  [SOT416]  93.51,32.07 90 top
Q17  2N7002BKT  [SOT416]  73.19,94.3 90 top
Q18  BSS84AKT  [SOT416]  74.93,89.85 270 top
Q19  2N7002BKT  [SOT416]  105.89,64.77 0 top
Q20  BSS84AKT  [SOT416]  104.62,61.75 180 top
Q21  2N7002BKT  [SOT416]  124.78,99.22 90 top
Q22  2N7002BKT  [SOT416]  123.51,32.07 90 top
Q23  2N7002BKT  [SOT416]  103.19,94.3 90 top
Q24  BSS84AKT  [SOT416]  104.93,89.85 270 top
Q25  2N7002BKT  [SOT416]  135.89,64.77 0 top
Q26  BSS84AKT  [SOT416]  134.62,61.75 180 top
Q27  2N7002BKT  [SOT416]  154.78,99.22 90 top
Q28  2N7002BKT  [SOT416]  153.51,32.07 90 top
Q29  2N7002BKT  [SOT416]  133.19,94.3 90 top
Q30  BSS84AKT  [SOT416]  134.93,89.85 270 top
QB1  PMV65XP  [SOT416]  19.86,27.78 90 bottom
QB2  PMV65XP  [SOT416]  19.86,32.23 90 bottom
QB3  PMV65XP  [SOT416]  20.49,36.67 90 bottom
QB4  PMV65XP  [SOT416]  20.49,41.12 90 bottom
QB5  PMV65XP  [SOT416]  20.49,45.56 90 bottom
QB6  PMV65XP  [SOT416]  20.49,50.01 90 bottom
QB7  PMV65XP  [SOT416]  20.49,54.45 90 bottom
QB8  PMV65XP  [SOT416]  20.49,58.9 90 bottom
QB9  PMV65XP  [SOT416]  20.49,63.34 90 bottom
QB10  PMV65XP  [SOT416]  20.49,67.78 90 bottom
QB11  PMV65XP  [SOT416]  20.49,72.23 90 bottom
QB12  PMV65XP  [SOT416]  20.49,76.67 90 bottom
QB13  PMV65XP  [SOT416]  20.49,81.12 90 bottom
QB14  PMV65XP  [SOT416]  20.49,85.56 90 bottom
QB15  PMV65XP  [SOT416]  20.49,90.01 90 bottom
QB16  PMV65XP  [SOT416]  20.49,94.45 90 bottom
QB17  PMV65XP  [SOT416]  49.85,27.78 90 bottom
QB18  PMV65XP  [SOT416]  49.85,32.23 90 bottom
QB19  PMV65XP  [SOT416]  50.49,36.67 90 bottom
QB20  PMV65XP  [SOT416]  50.49,41.12 90 bottom
QB21  PMV65XP  [SOT416]  50.49,45.56 90 bottom
QB22  PMV65XP  [SOT416]  50.49,50.01 90 bottom
QB23  PMV65XP  [SOT416]  50.49,54.45 90 bottom
QB24  PMV65XP  [SOT416]  50.49,58.9 90 bottom
QB25  PMV65XP  [SOT416]  50.49,63.34 90 bottom
QB26  PMV65XP  [SOT416]  50.49,67.78 90 bottom
QB27  PMV65XP  [SOT416]  50.49,72.23 90 bottom
QB28  PMV65XP  [SOT416]  50.49,76.67 90 bottom
QB29  PMV65XP  [SOT416]  50.49,81.12 90 bottom
QB30  PMV65XP  [SOT416]  50.49,85.56 90 bottom
QB31  PMV65XP  [SOT416]  50.49,90.01 90 bottom
QB32  PMV65XP  [SOT416]  50.49,94.45 90 bottom
QB33  PMV65XP  [SOT416]  79.86,27.78 90 bottom
QB34  PMV65XP  [SOT416]  79.86,32.23 90 bottom
QB35  PMV65XP  [SOT416]  80.49,36.67 90 bottom
QB36  PMV65XP  [SOT416]  80.49,41.12 90 bottom
QB37  PMV65XP  [SOT416]  80.49,45.56 90 bottom
QB38  PMV65XP  [SOT416]  80.49,50.01 90 bottom
QB39  PMV65XP  [SOT416]  80.49,54.45 90 bottom
QB40  PMV65XP  [SOT416]  80.49,58.9 90 bottom
QB41  PMV65XP  [SOT416]  80.49,63.34 90 bottom
QB42  PMV65XP  [SOT416]  80.49,67.78 90 bottom
QB43  PMV65XP  [SOT416]  80.49,72.23 90 bottom
QB44  PMV65XP  [SOT416]  80.49,76.67 90 bottom
QB45  PMV65XP  [SOT416]  80.49,81.12 90 bottom
QB46  PMV65XP  [SOT416]  80.49,85.56 90 bottom
QB47  PMV65XP  [SOT416]  80.49,90.01 90 bottom
QB48  PMV65XP  [SOT416]  80.49,94.45 90 bottom
QB49  PMV65XP  [SOT416]  109.86,27.78 90 bottom
QB50  PMV65XP  [SOT416]  109.86,32.23 90 bottom
QB51  PMV65XP  [SOT416]  110.49,36.67 90 bottom
QB52  PMV65XP  [SOT416]  110.49,41.12 90 bottom
QB53  PMV65XP  [SOT416]  110.49,45.56 90 bottom
QB54  PMV65XP  [SOT416]  110.49,50.01 90 bottom
QB55  PMV65XP  [SOT416]  110.49,54.45 90 bottom
QB56  PMV65XP  [SOT416]  110.49,58.9 90 bottom
QB57  PMV65XP  [SOT416]  110.49,63.34 90 bottom
QB58  PMV65XP  [SOT416]  110.49,67.78 90 bottom
QB59  PMV65XP  [SOT416]  110.49,72.23 90 bottom
QB60  PMV65XP  [SOT416]  110.49,76.67 90 bottom
QB61  PMV65XP  [SOT416]  110.49,81.12 90 bottom
QB62  PMV65XP  [SOT416]  110.49,85.56 90 bottom
QB63  PMV65XP  [SOT416]  110.49,90.01 90 bottom
QB64  PMV65XP  [SOT416]  110.49,94.45 90 bottom
QB65  PMV65XP  [SOT416]  139.85,27.78 90 bottom
QB66  PMV65XP  [SOT416]  139.85,32.23 90 bottom
QB67  PMV65XP  [SOT416]  140.49,36.67 90 bottom
QB68  PMV65XP  [SOT416]  140.49,41.12 90 bottom
QB69  PMV65XP  [SOT416]  140.49,45.56 90 bottom
QB70  PMV65XP  [SOT416]  140.49,50.01 90 bottom
QB71  PMV65XP  [SOT416]  140.49,54.45 90 bottom
QB72  PMV65XP  [SOT416]  140.49,58.9 90 bottom
QB73  PMV65XP  [SOT416]  140.49,63.34 90 bottom
QB74  PMV65XP  [SOT416]  140.49,67.78 90 bottom
QB75  PMV65XP  [SOT416]  140.49,72.23 90 bottom
QB76  PMV65XP  [SOT416]  140.49,76.67 90 bottom
QB77  PMV65XP  [SOT416]  140.49,81.12 90 bottom
QB78  PMV65XP  [SOT416]  140.49,85.56 90 bottom
QB79  PMV65XP  [SOT416]  140.49,90.01 90 bottom
QB80  PMV65XP  [SOT416]  140.49,94.45 90 bottom
R1  100  [R0402]  36.21,45.32 90 bottom
R2  VAR  [R0402]  27.16,35.24 90 bottom
R3  100  [R0402]  33.35,45.96 90 bottom
R4  100  [R0402]  35.25,45.96 90 bottom
R5  100  [R0402]  34.3,45.96 90 bottom
R6  100  [R0402]  33.51,28.57 270 bottom
R7  100  [R0402]  32.24,28.57 270 bottom
R8  330  [R0603]  31.92,99.53 180 top
R9  10k  [R0402]  35.73,89.38 0 bottom
R10  332k0.1%  [R0603]  30.17,72.71 0 bottom
R11  10k  [R0402]  35.73,42.23 180 top
R12  1.5k  [R0402]  17.95,113.7 90 bottom
R13  100  [R0402]  25.57,109.97 270 top
R14  100  [R0402]  24.18,109.54 0 top
R15  10k  [R0402]  35.73,33.81 0 bottom
R16  20k0.1%  [R0603]  30.81,70.48 90 bottom
R17  1M  [R0402]  35.41,61.12 180 bottom
R18  1M  [R0402]  35.41,62.07 180 bottom
R19  4.7k  [R0402]  35.41,63.02 180 bottom
R20  1M  [R0402]  35.41,63.98 180 bottom
R21  60  [R0402]  25.25,113.5 0 bottom
R22  60  [R0402]  23.03,114.78 0 bottom
R23  VAR  [R0402]  27.16,37.62 90 bottom
R24  VAR  [R0402]  27.16,92.55 90 bottom
R25  VAR  [R0402]  27.16,94.38 90 bottom
R26  1M  [R0402]  65.41,61.12 180 bottom
R27  1M  [R0402]  65.41,62.07 180 bottom
R28  4.7k  [R0402]  65.41,63.02 180 bottom
R29  1M  [R0402]  65.41,63.98 180 bottom
R30  100  [R0402]  66.21,45.32 90 bottom
R31  100  [R0402]  63.35,45.96 90 bottom
R32  100  [R0402]  65.25,45.96 90 bottom
R33  100  [R0402]  64.3,45.96 90 bottom
R34  100  [R0402]  63.51,28.57 270 bottom
R35  100  [R0402]  62.24,28.57 270 bottom
R36  10k  [R0402]  65.73,89.38 0 bottom
R37  1.5k  [R0402]  47.95,113.7 90 bottom
R38  100  [R0402]  55.57,109.97 270 top
R39  1.5k  [R0402]  17.95,11.9 0 top
R40  100  [R0402]  33.51,19.21 90 bottom
R41  100  [R0402]  32.24,19.21 90 bottom
R42  330  [R0603]  30.81,30.95 180 top
R43  330  [R0603]  31.92,97.79 180 top
R44  100  [R0402]  35.89,83.5 270 bottom
R45  100  [R0402]  33.03,83.5 270 bottom
R46  100  [R0402]  34.94,83.5 270 bottom
R47  100  [R0402]  33.98,83.5 270 bottom
R48  100  [R0402]  24.93,100.65 90 top
R49  100  [R0402]  23.66,100.65 90 top
R50  10k  [R0402]  35.09,97.47 180 top
R51  10k  [R0402]  33.83,92.39 270 bottom
R52  10k  [R0402]  35.73,35.56 0 bottom
R53  330  [R0603]  30.81,32.54 180 top
R54  100  [R0402]  54.18,109.54 0 top
R55  1M  [R0402]  35.41,74.77 180 bottom
R56  1M  [R0402]  35.41,75.72 180 bottom
R57  4.7k  [R0402]  35.41,76.83 180 bottom
R58  1M  [R0402]  35.41,77.94 180 bottom
R59  332k0.1%  [R0603]  30.02,58.58 0 bottom
R60  20k0.1%  [R0603]  30.65,56.51 90 bottom
R61  10k  [R0402]  65.73,42.23 180 top
R62  10k  [R0402]  65.73,33.81 0 bottom
R63  330  [R0603]  61.92,99.53 180 top
R64  332k0.1%  [R0603]  60.17,72.71 0 bottom
R65  20k0.1%  [R0603]  60.81,70.48 90 bottom
R66  60  [R0402]  55.25,113.5 0 bottom
R67  60  [R0402]  53.03,114.78 0 bottom
R68  1.5k  [R0402]  47.95,11.9 0 top
R69  100  [R0402]  63.51,19.21 90 bottom
R70  100  [R0402]  62.24,19.21 90 bottom
R71  330  [R0603]  60.81,30.95 180 top
R72  330  [R0603]  61.92,97.79 180 top
R73  100  [R0402]  65.89,83.5 270 bottom
R74  100  [R0402]  63.03,83.5 270 bottom
R75  100  [R0402]  64.94,83.5 270 bottom
R76  100  [R0402]  63.98,83.5 270 bottom
R77  100  [R0402]  54.94,100.65 90 top
R78  100  [R0402]  53.66,100.65 90 top
R79  10k  [R0402]  65.09,97.47 180 top
R80  10k  [R0402]  63.83,92.39 270 bottom
R81  10k  [R0402]  65.73,35.56 0 bottom
R82  330  [R0603]  60.81,32.54 180 top
R83  1M  [R0402]  65.41,74.77 180 bottom
R84  1M  [R0402]  65.41,75.72 180 bottom
R85  4.7k  [R0402]  65.41,76.83 180 bottom
R86  1M  [R0402]  65.41,77.94 180 bottom
R87  332k0.1%  [R0603]  60.02,58.58 0 bottom
R88  20k0.1%  [R0603]  60.65,56.51 90 bottom
R89  VAR  [R0402]  57.16,35.24 90 bottom
R90  VAR  [R0402]  57.16,37.62 90 bottom
R91  VAR  [R0402]  57.16,92.55 90 bottom
R92  VAR  [R0402]  57.16,94.38 90 bottom
R93  1M  [R0402]  95.41,61.12 180 bottom
R94  1M  [R0402]  95.41,62.07 180 bottom
R95  4.7k  [R0402]  95.41,63.02 180 bottom
R96  1M  [R0402]  95.41,63.98 180 bottom
R97  100  [R0402]  96.21,45.32 90 bottom
R98  100  [R0402]  93.35,45.96 90 bottom
R99  100  [R0402]  95.25,45.96 90 bottom
R100  100  [R0402]  94.3,45.96 90 bottom
R101  100  [R0402]  93.51,28.57 270 bottom
R102  100  [R0402]  92.24,28.57 270 bottom
R103  10k  [R0402]  95.73,89.38 0 bottom
R104  1.5k  [R0402]  77.95,113.7 90 bottom
R105  100  [R0402]  85.57,109.97 270 top
R106  100  [R0402]  84.18,109.54 0 top
R107  10k  [R0402]  95.73,42.23 180 top
R108  10k  [R0402]  95.73,33.81 0 bottom
R109  330  [R0603]  91.92,99.53 180 top
R110  332k0.1%  [R0603]  90.17,72.71 0 bottom
R111  20k0.1%  [R0603]  90.81,70.48 90 bottom
R112  60  [R0402]  85.25,113.5 0 bottom
R113  60  [R0402]  83.03,114.78 0 bottom
R114  1.5k  [R0402]  77.95,11.9 0 top
R115  100  [R0402]  93.51,19.21 90 bottom
R116  100  [R0402]  92.24,19.21 90 bottom
R117  330  [R0603]  90.81,30.95 180 top
R118  330  [R0603]  91.92,97.79 180 top
R119  100  [R0402]  95.89,83.5 270 bottom
R120  100  [R0402]  93.03,83.5 270 bottom
R121  100  [R0402]  94.94,83.5 270 bottom
R122  100  [R0402]  93.98,83.5 270 bottom
R123  100  [R0402]  84.94,100.65 90 top
R124  100  [R0402]  83.67,100.65 90 top
R125  10k  [R0402]  95.09,97.47 180 top
R126  10k  [R0402]  93.83,92.39 270 bottom
R127  10k  [R0402]  95.73,35.56 0 bottom
R128  330  [R0603]  90.81,32.54 180 top
R129  1M  [R0402]  95.41,74.77 180 bottom
R130  1M  [R0402]  95.41,75.72 180 bottom
R131  4.7k  [R0402]  95.41,76.83 180 bottom
R132  1M  [R0402]  95.41,77.94 180 bottom
R133  332k0.1%  [R0603]  90.02,58.58 0 bottom
R134  20k0.1%  [R0603]  90.65,56.51 90 bottom
R135  VAR  [R0402]  87.16,35.24 90 bottom
R136  VAR  [R0402]  87.16,37.62 90 bottom
R137  VAR  [R0402]  87.16,92.55 90 bottom
R138  VAR  [R0402]  87.16,94.38 90 bottom
R139  1M  [R0402]  125.41,61.12 180 bottom
R140  1M  [R0402]  125.41,62.07 180 bottom
R141  4.7k  [R0402]  125.41,63.02 180 bottom
R142  1M  [R0402]  125.41,63.98 180 bottom
R143  100  [R0402]  126.21,45.32 90 bottom
R144  100  [R0402]  123.35,45.96 90 bottom
R145  100  [R0402]  125.25,45.96 90 bottom
R146  100  [R0402]  124.3,45.96 90 bottom
R147  100  [R0402]  123.51,28.57 270 bottom
R148  100  [R0402]  122.24,28.57 270 bottom
R149  10k  [R0402]  125.73,89.38 0 bottom
R150  1.5k  [R0402]  107.95,113.7 90 bottom
R151  100  [R0402]  115.57,109.97 270 top
R152  100  [R0402]  114.18,109.54 0 top
R153  10k  [R0402]  125.73,42.23 180 top
R154  10k  [R0402]  125.73,33.81 0 bottom
R155  330  [R0603]  121.92,99.53 180 top
R156  332k0.1%  [R0603]  120.17,72.71 0 bottom
R157  20k0.1%  [R0603]  120.81,70.48 90 bottom
R158  60  [R0402]  115.25,113.5 0 bottom
R159  60  [R0402]  113.03,114.78 0 bottom
R160  1.5k  [R0402]  107.95,11.9 0 top
R161  100  [R0402]  123.51,19.21 90 bottom
R162  100  [R0402]  122.24,19.21 90 bottom
R163  330  [R0603]  120.81,30.95 180 top
R164  330  [R0603]  121.92,97.79 180 top
R165  100  [R0402]  125.89,83.5 270 bottom
R166  100  [R0402]  123.03,83.5 270 bottom
R167  100  [R0402]  124.94,83.5 270 bottom
R168  100  [R0402]  123.98,83.5 270 bottom
R169  100  [R0402]  114.94,100.65 90 top
R170  100  [R0402]  113.67,100.65 90 top
R171  10k  [R0402]  125.09,97.47 180 top
R172  10k  [R0402]  123.83,92.39 270 bottom
R173  10k  [R0402]  125.73,35.56 0 bottom
R174  330  [R0603]  120.81,32.54 180 top
R175  1M  [R0402]  125.41,74.77 180 bottom
R176  1M  [R0402]  125.41,75.72 180 bottom
R177  4.7k  [R0402]  125.41,76.83 180 bottom
R178  1M  [R0402]  125.41,77.94 180 bottom
R179  332k0.1%  [R0603]  120.02,58.58 0 bottom
R180  20k0.1%  [R0603]  120.65,56.51 90 bottom
R181  VAR  [R0402]  117.16,35.24 90 bottom
R182  VAR  [R0402]  117.16,37.62 90 bottom
R183  VAR  [R0402]  117.16,92.55 90 bottom
R184  VAR  [R0402]  117.16,94.38 90 bottom
R185  1M  [R0402]  155.41,61.12 180 bottom
R186  1M  [R0402]  155.41,62.07 180 bottom
R187  4.7k  [R0402]  155.41,63.02 180 bottom
R188  1M  [R0402]  155.41,63.98 180 bottom
R189  100  [R0402]  156.21,45.32 90 bottom
R190  100  [R0402]  153.35,45.96 90 bottom
R191  100  [R0402]  155.25,45.96 90 bottom
R192  100  [R0402]  154.3,45.96 90 bottom
R193  100  [R0402]  153.51,28.57 270 bottom
R194  100  [R0402]  152.24,28.57 270 bottom